# Altium PCB IPG_Rigid.PcbDoc (part 1 of 13)
Units mm, origin at the board's own origin, x right, y up, seen from the top; angles counter-clockwise.
Board outline 69.6 x 90.73 mm, 10 copper layers (TOP, DHOR, DVERT, GND 1, POWER, GND 2, GND 3, AVERT, AHOR, BOT), stack 1.198 mm thick; 745 components, 398 nets, 1997 pads, 2678 vias.
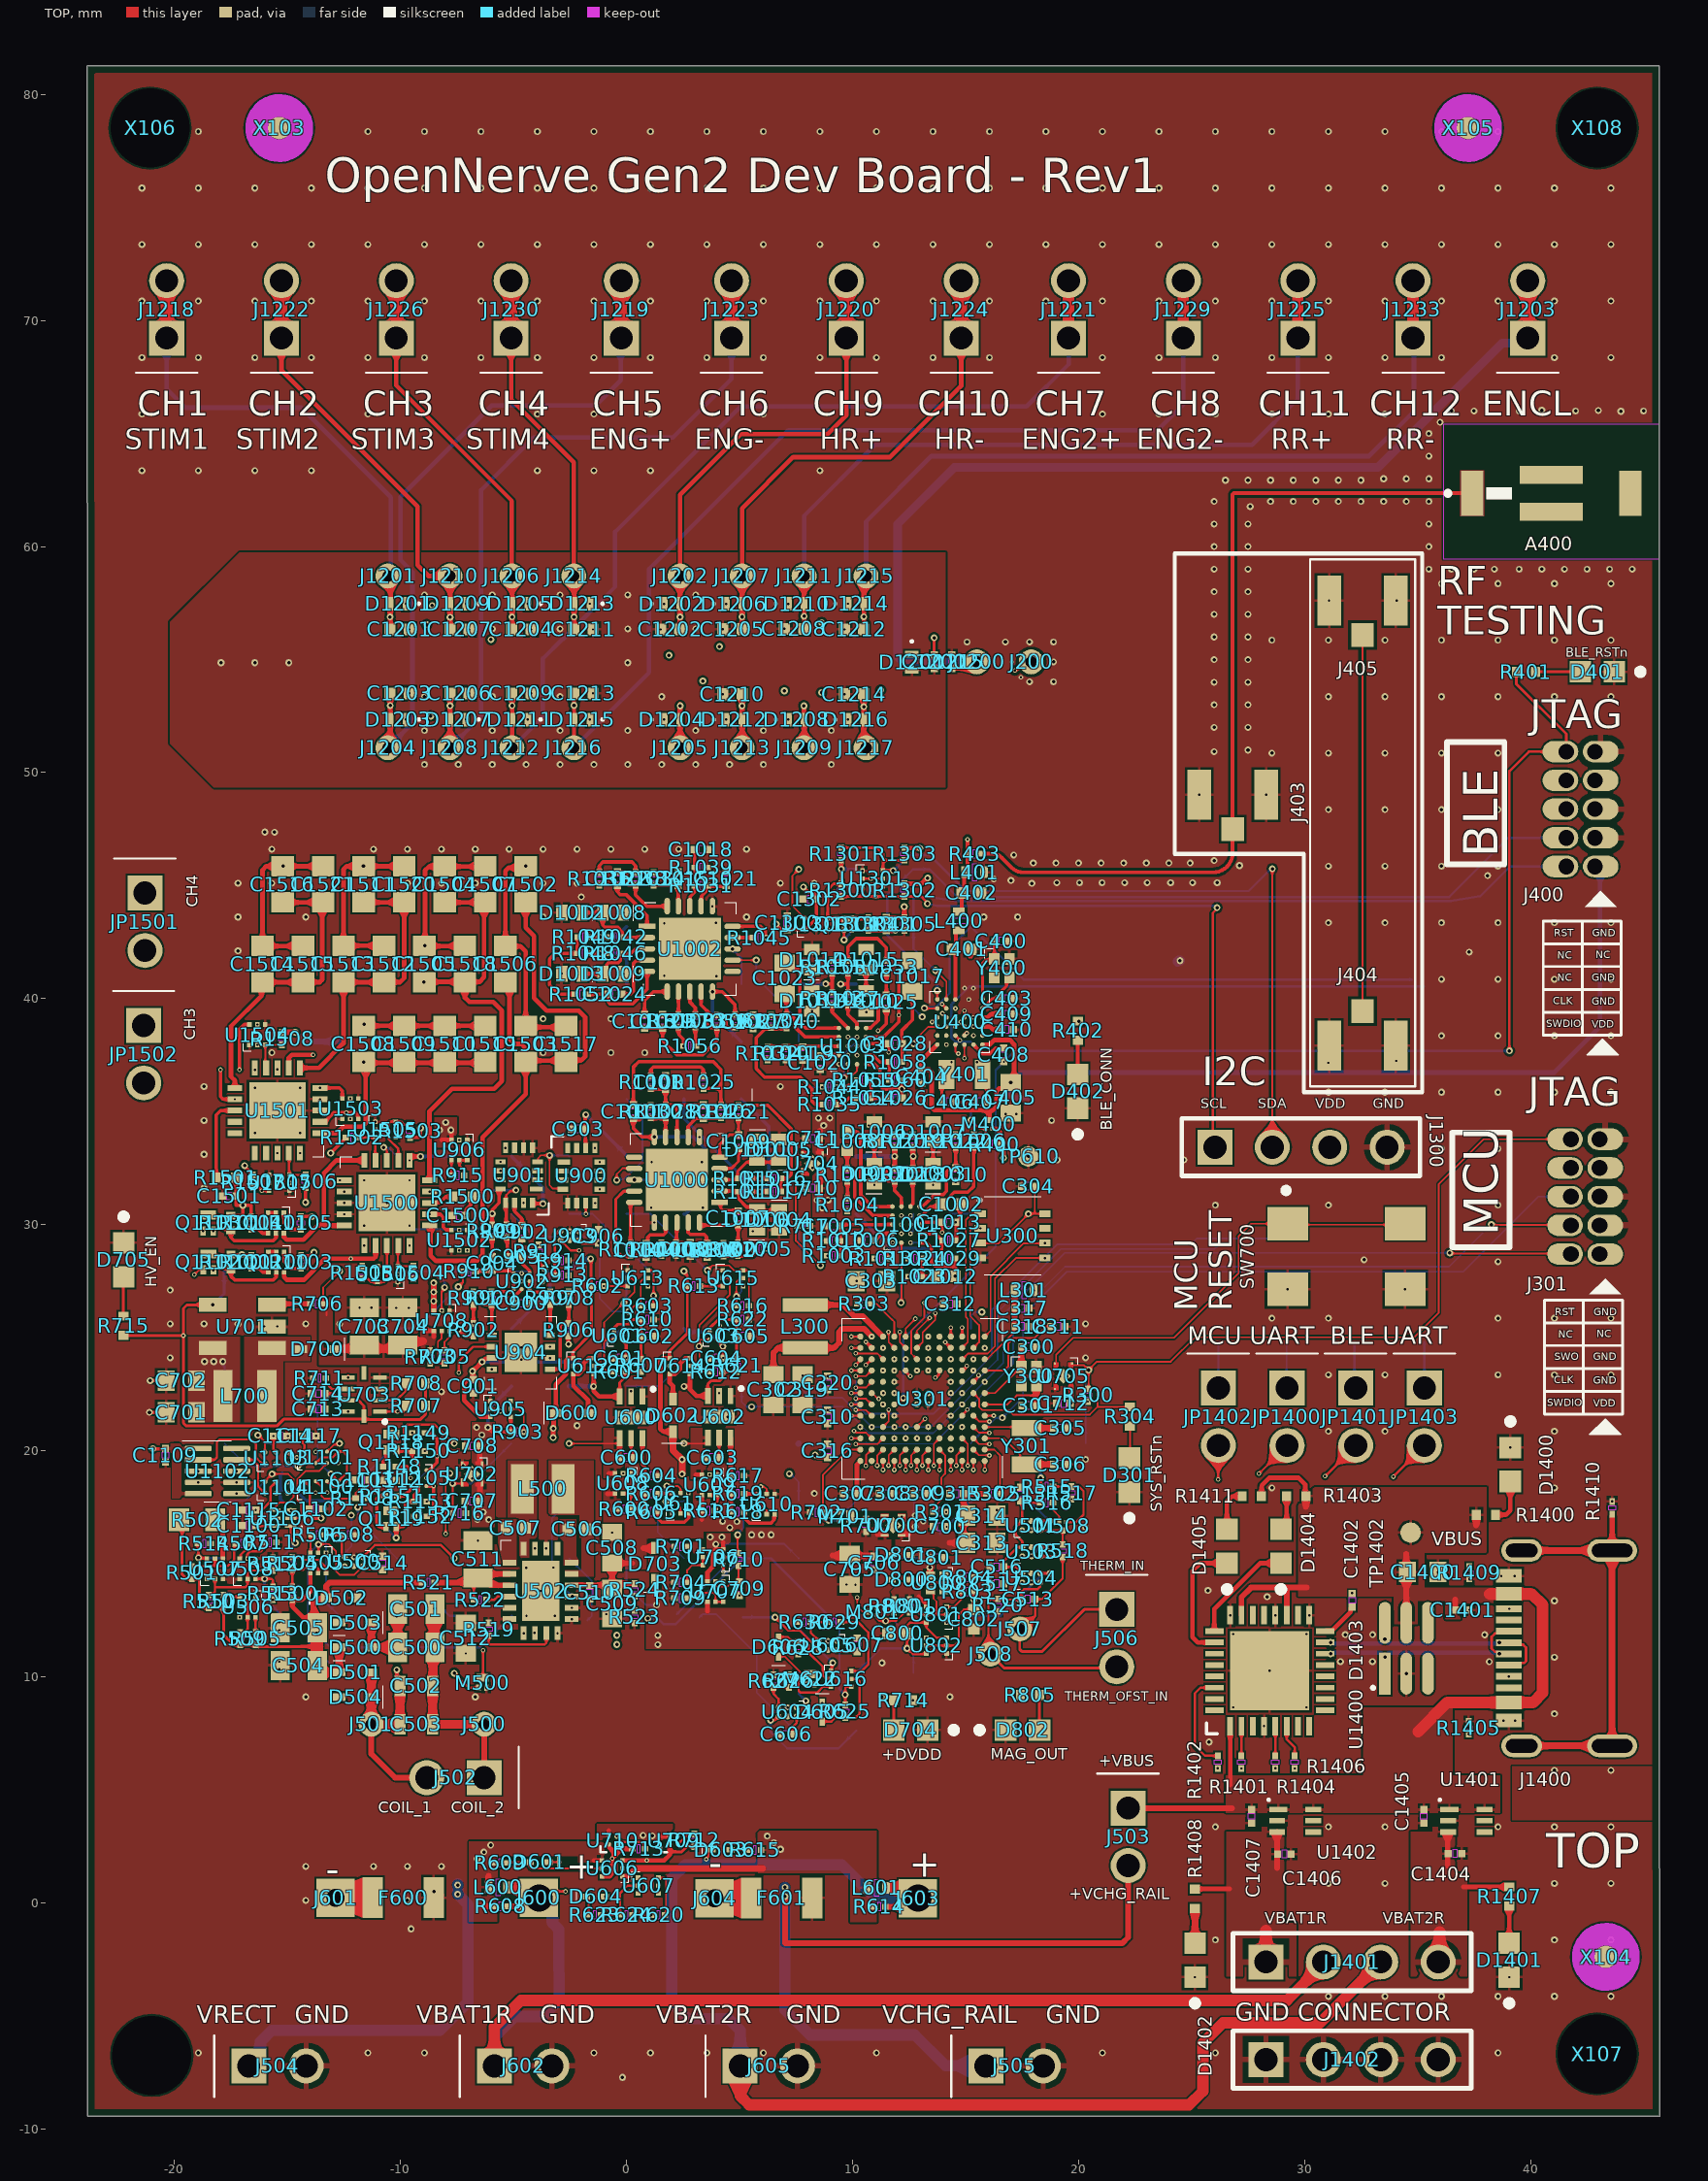
[diagram p0: TOP view]
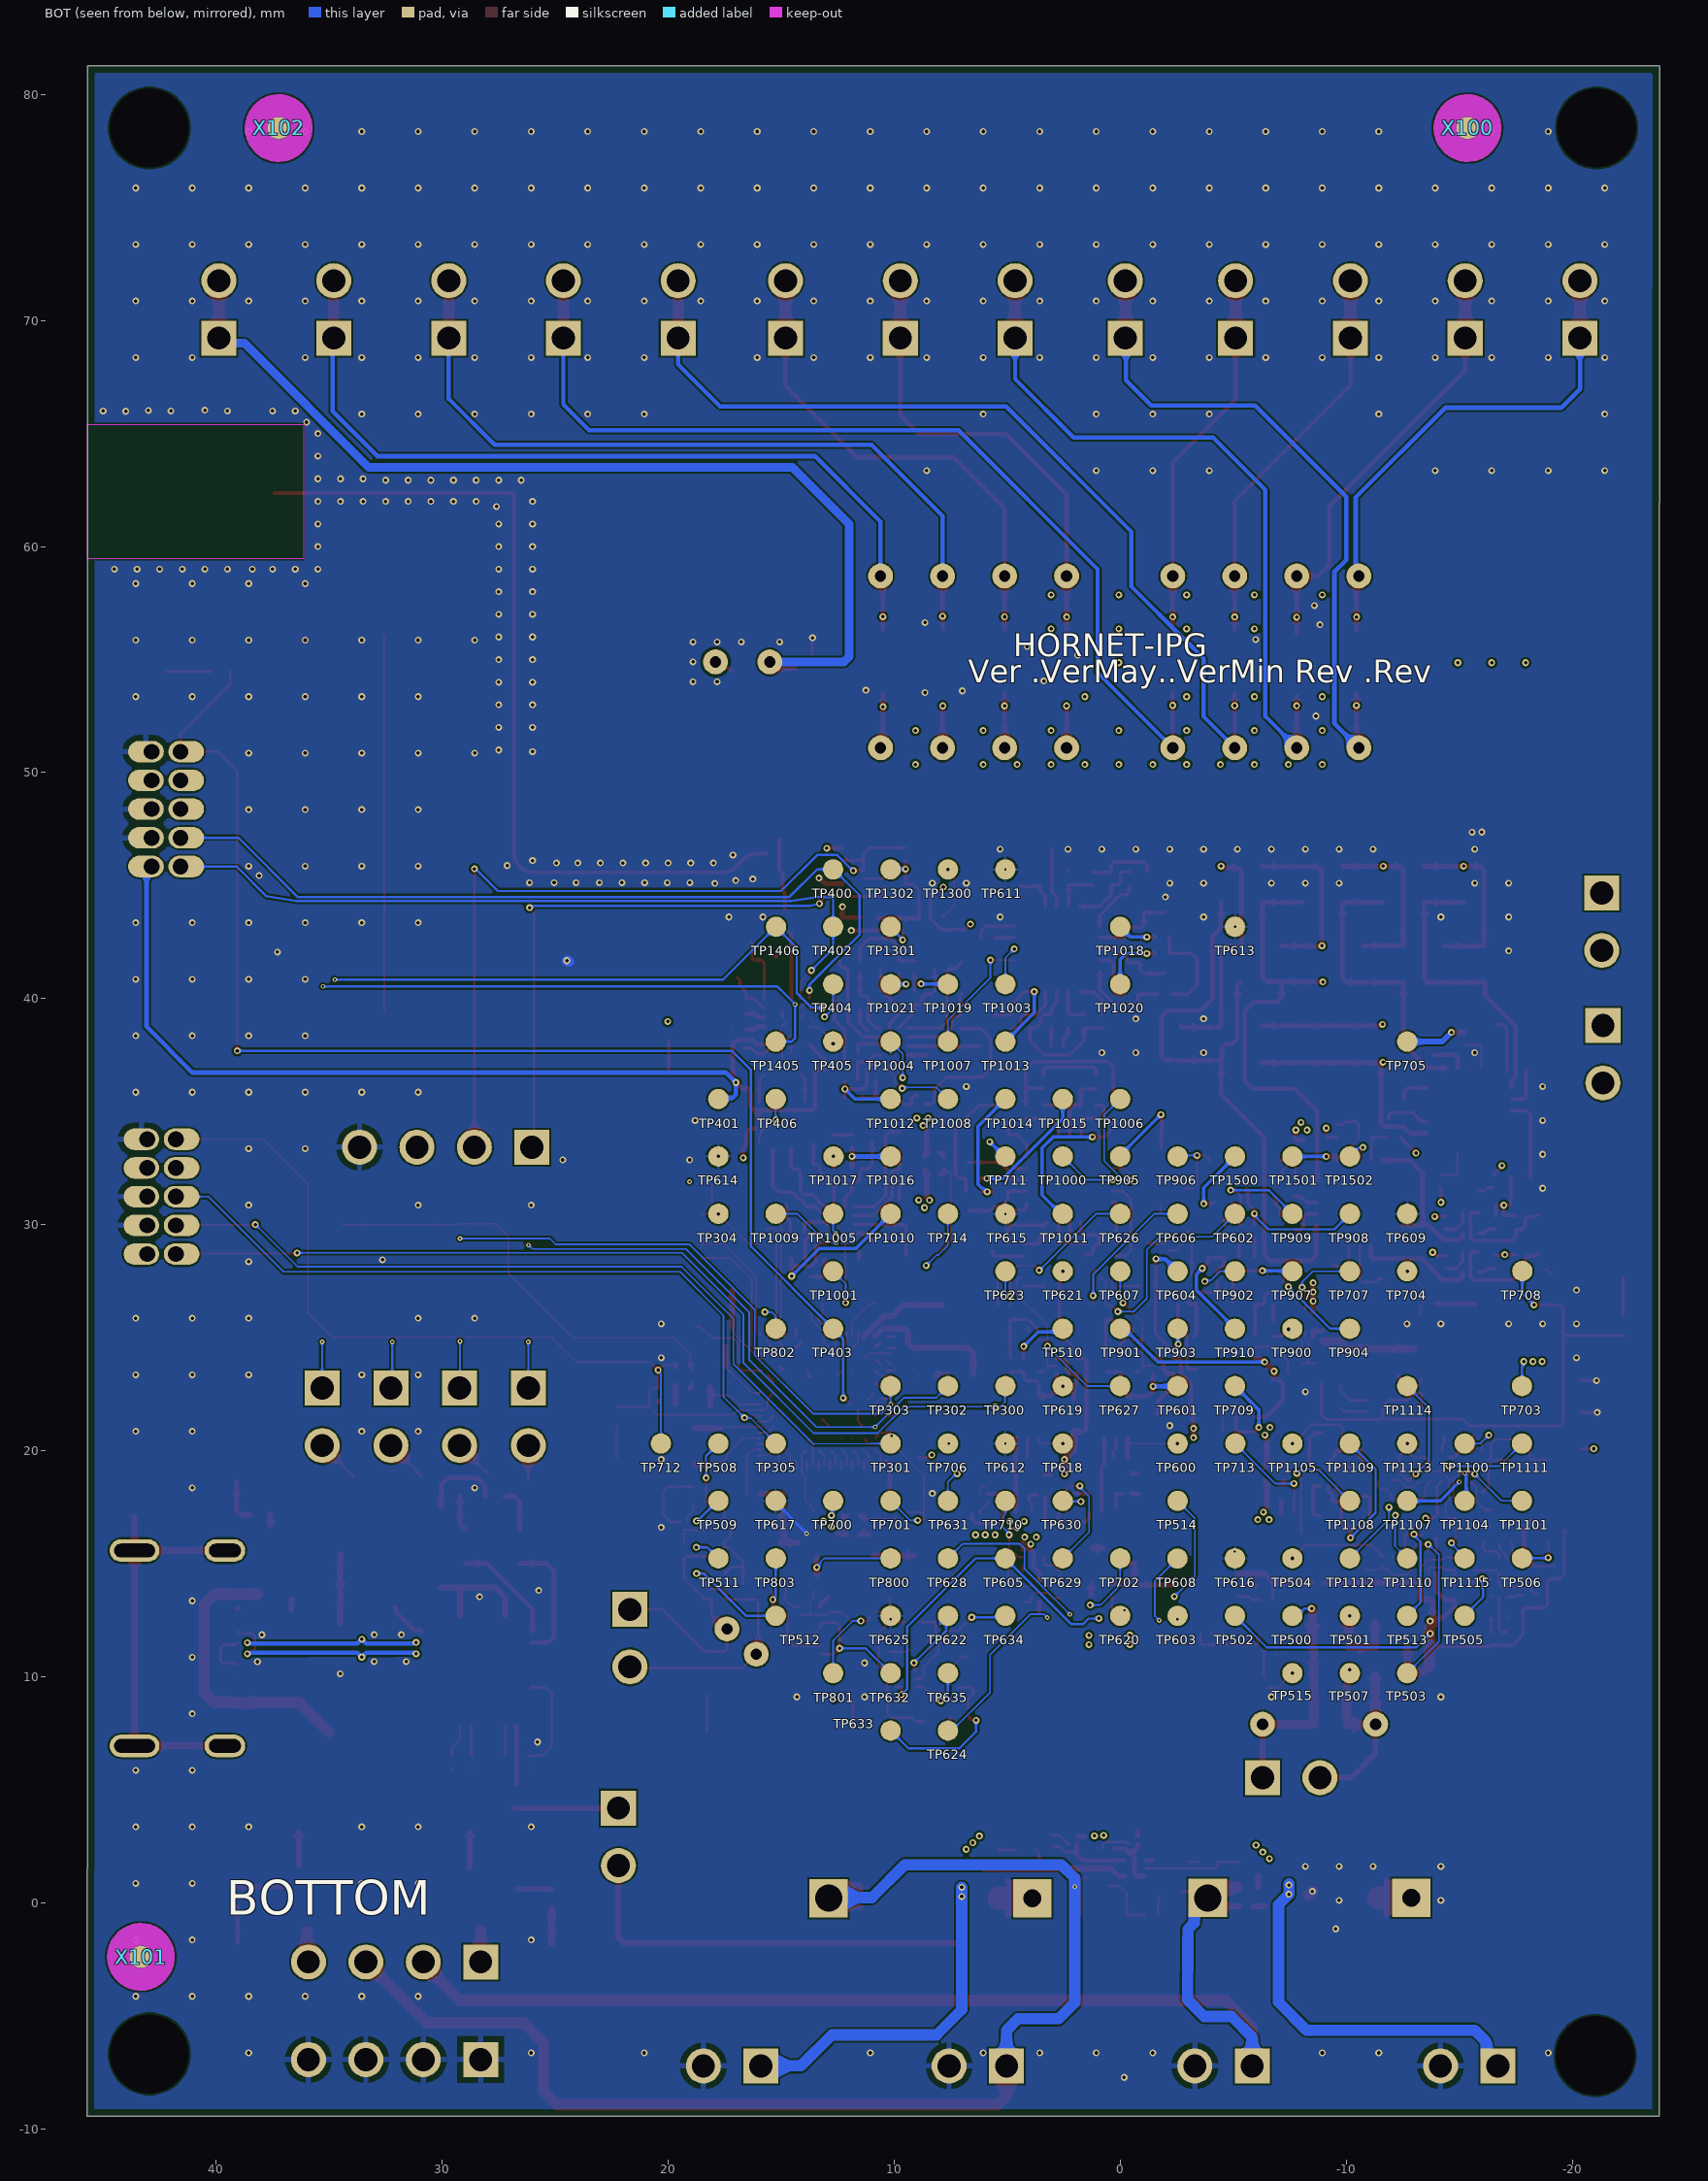
[diagram p1: BOT view, seen from below]
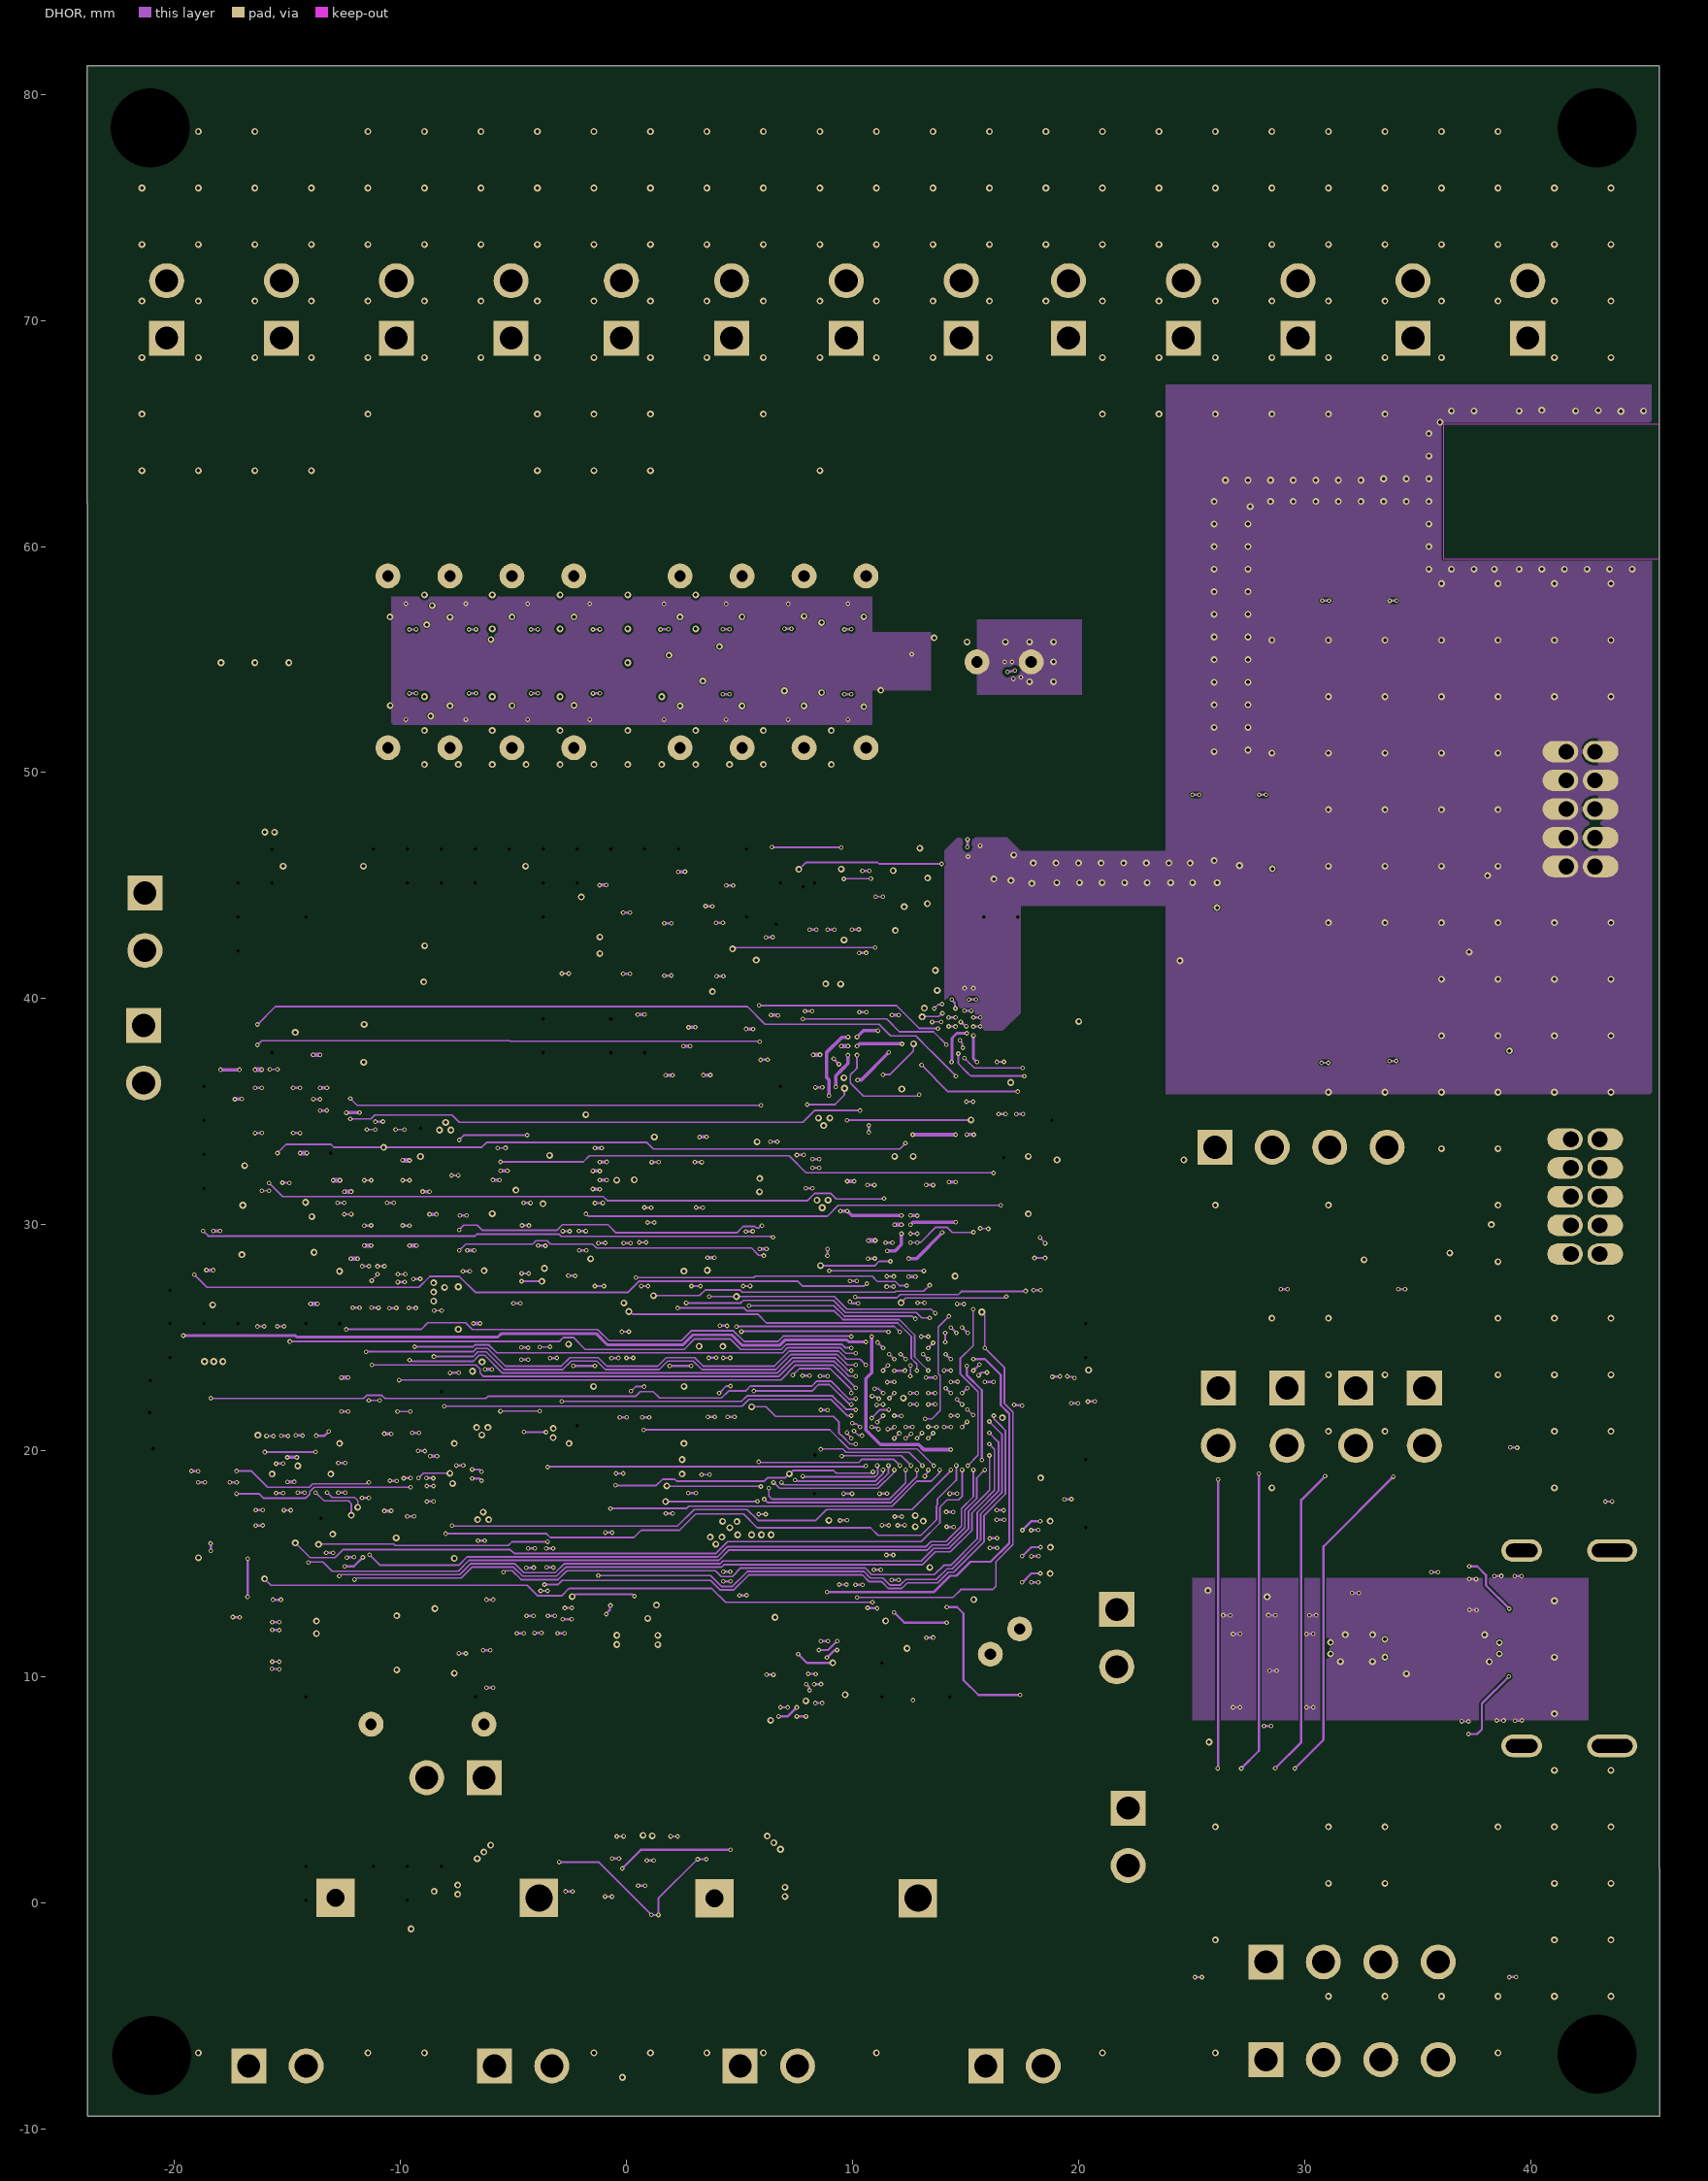
[diagram p2: DHOR]
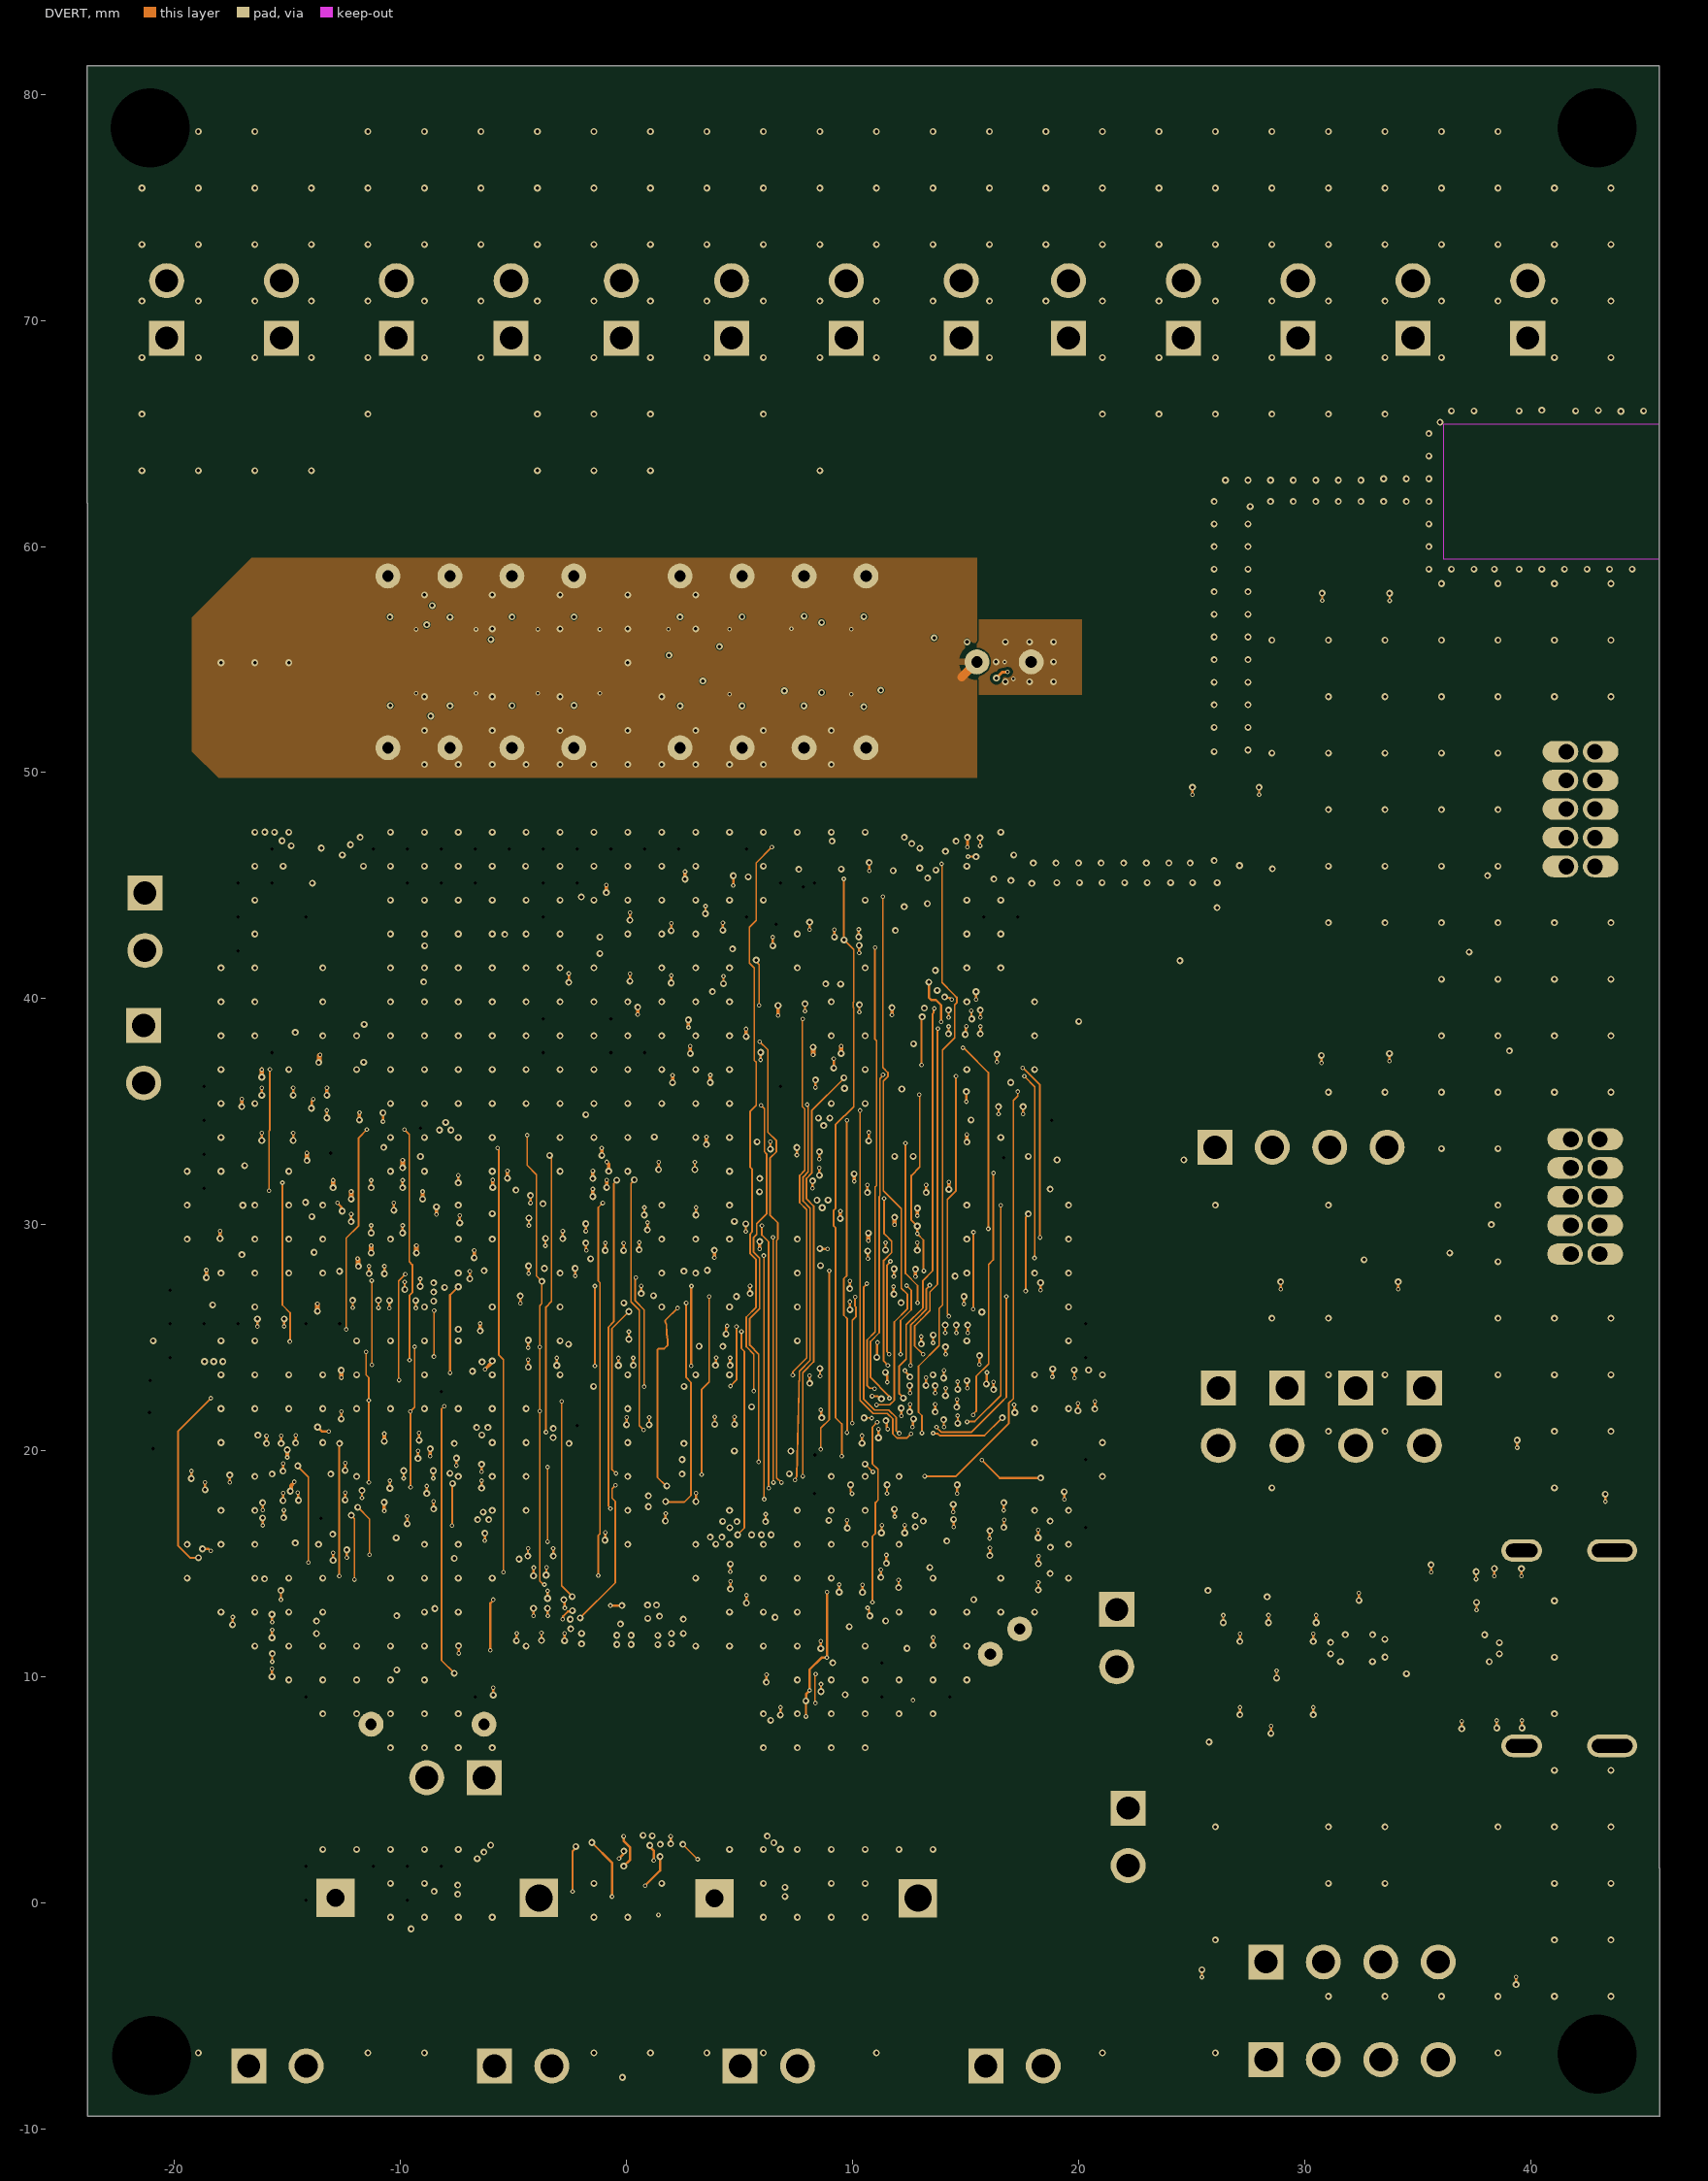
[diagram p3: DVERT]
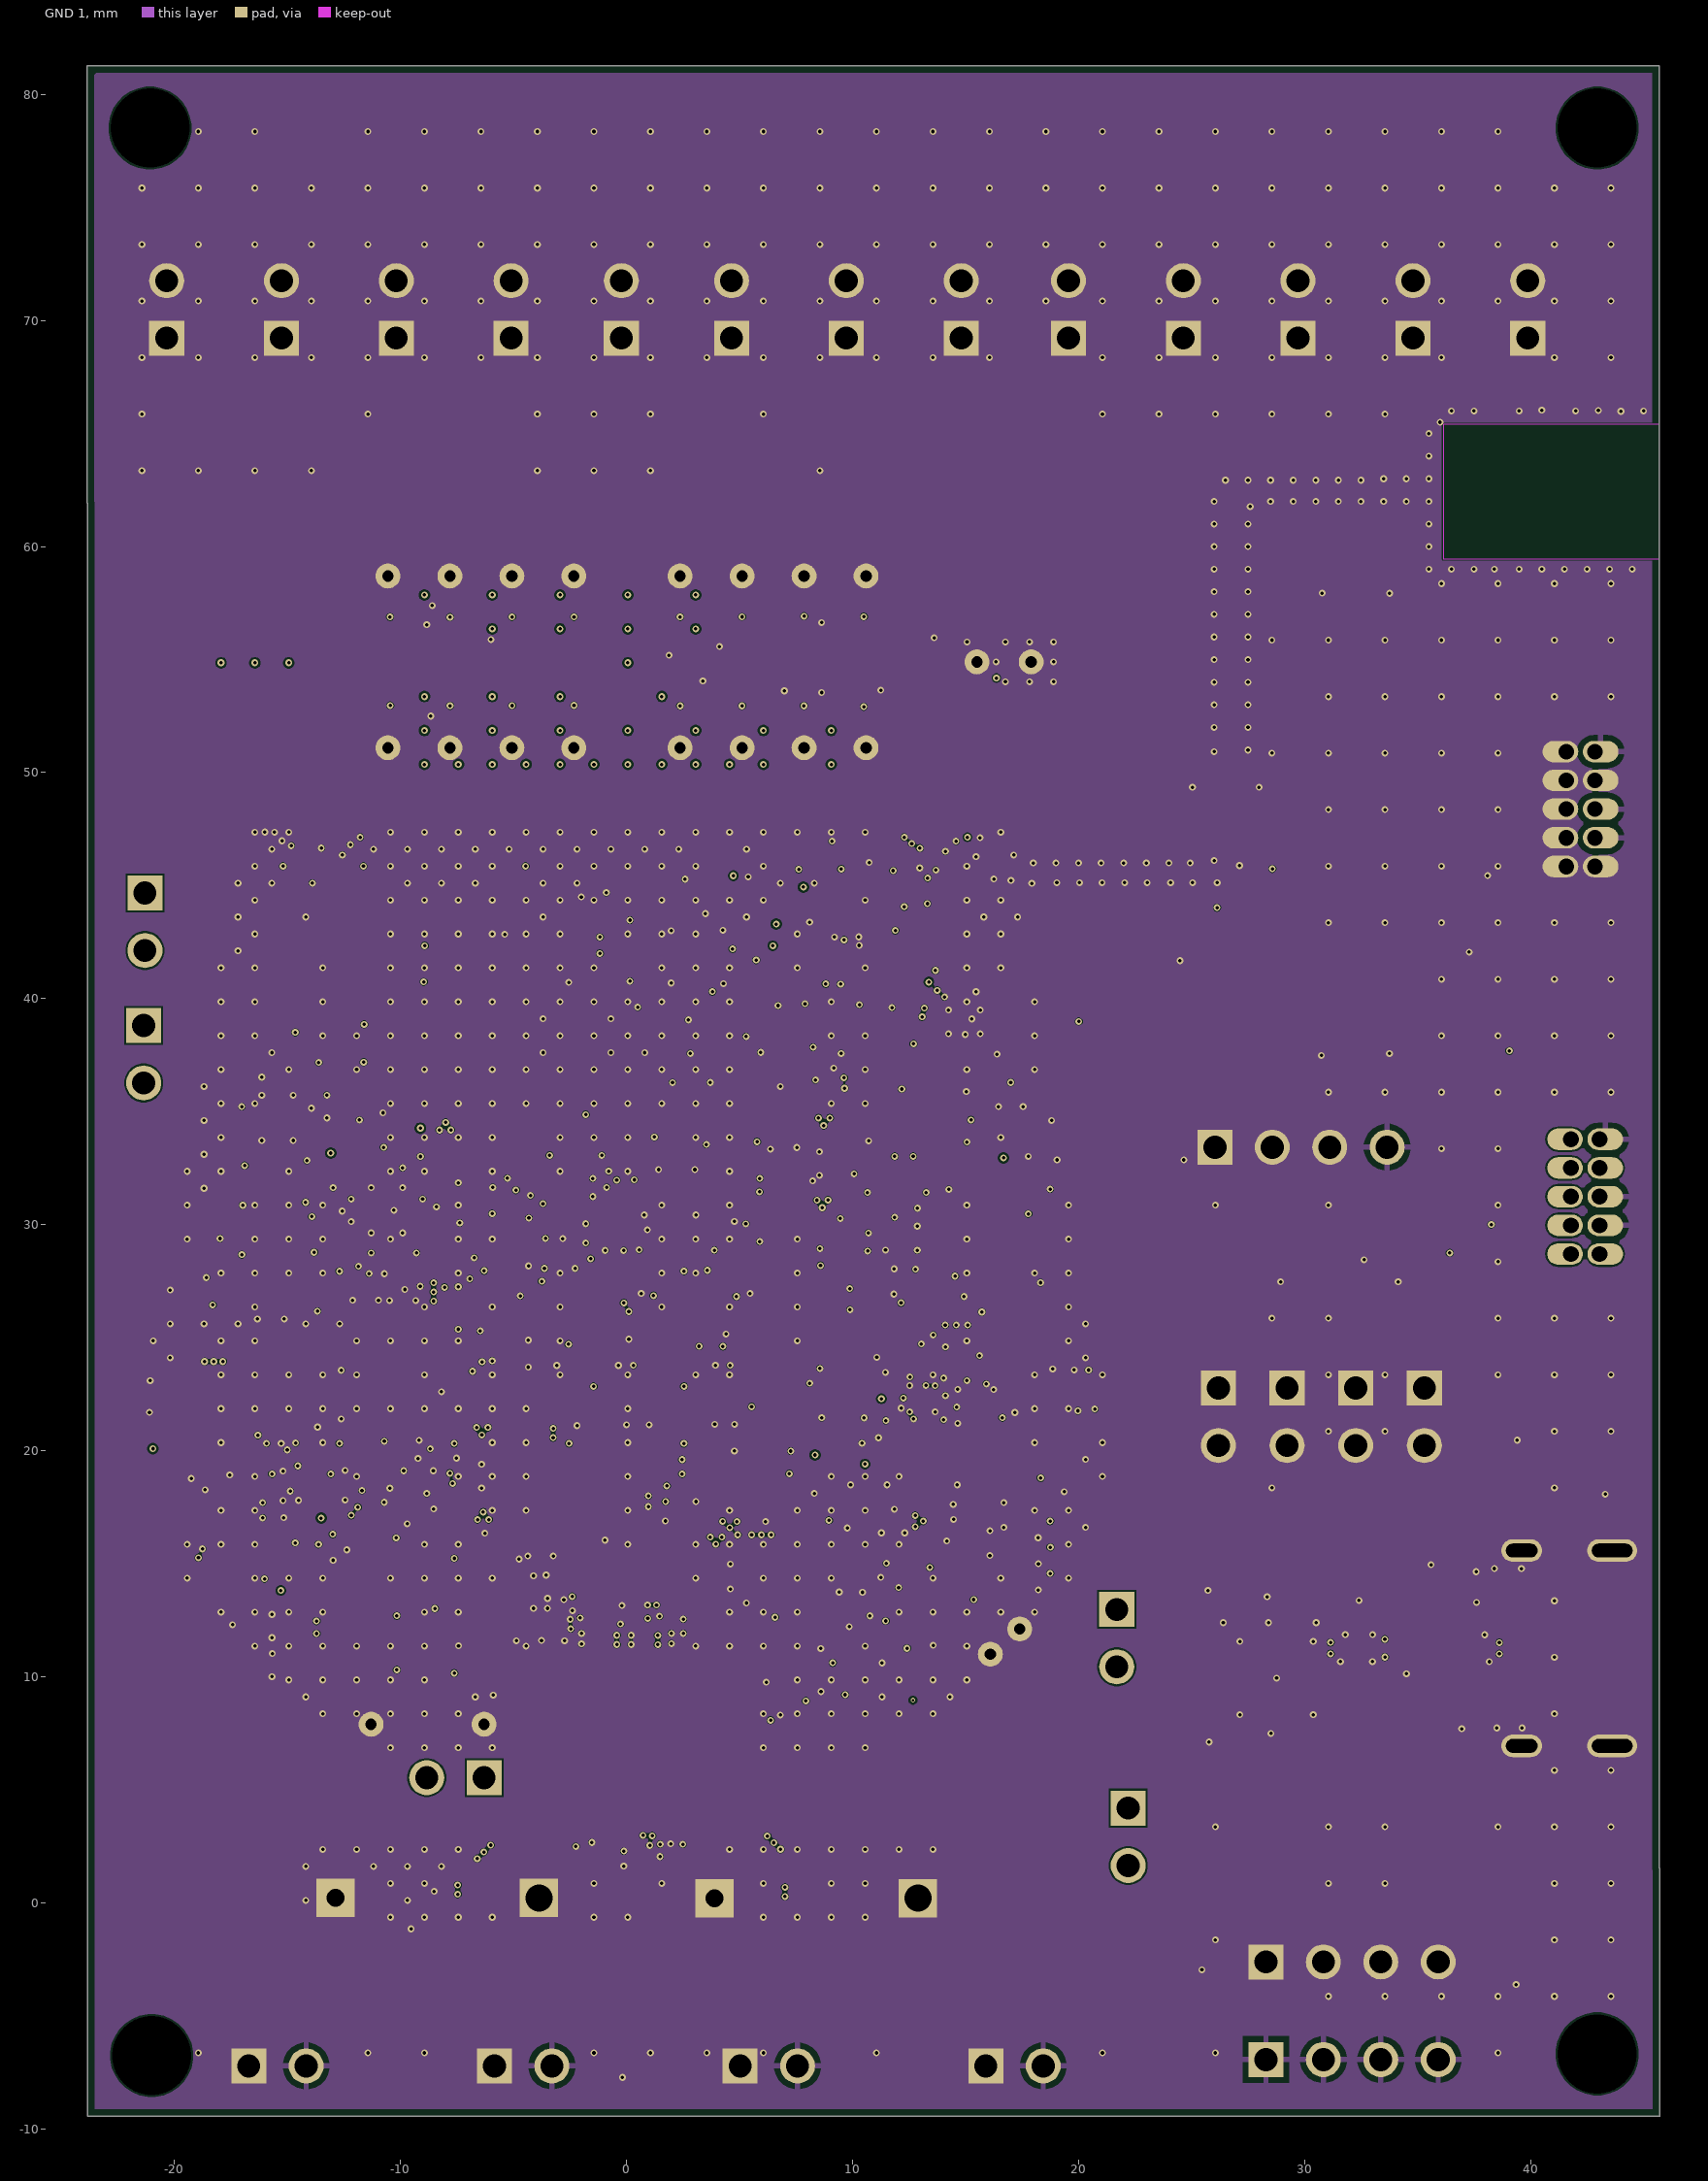
[diagram p4: GND 1]
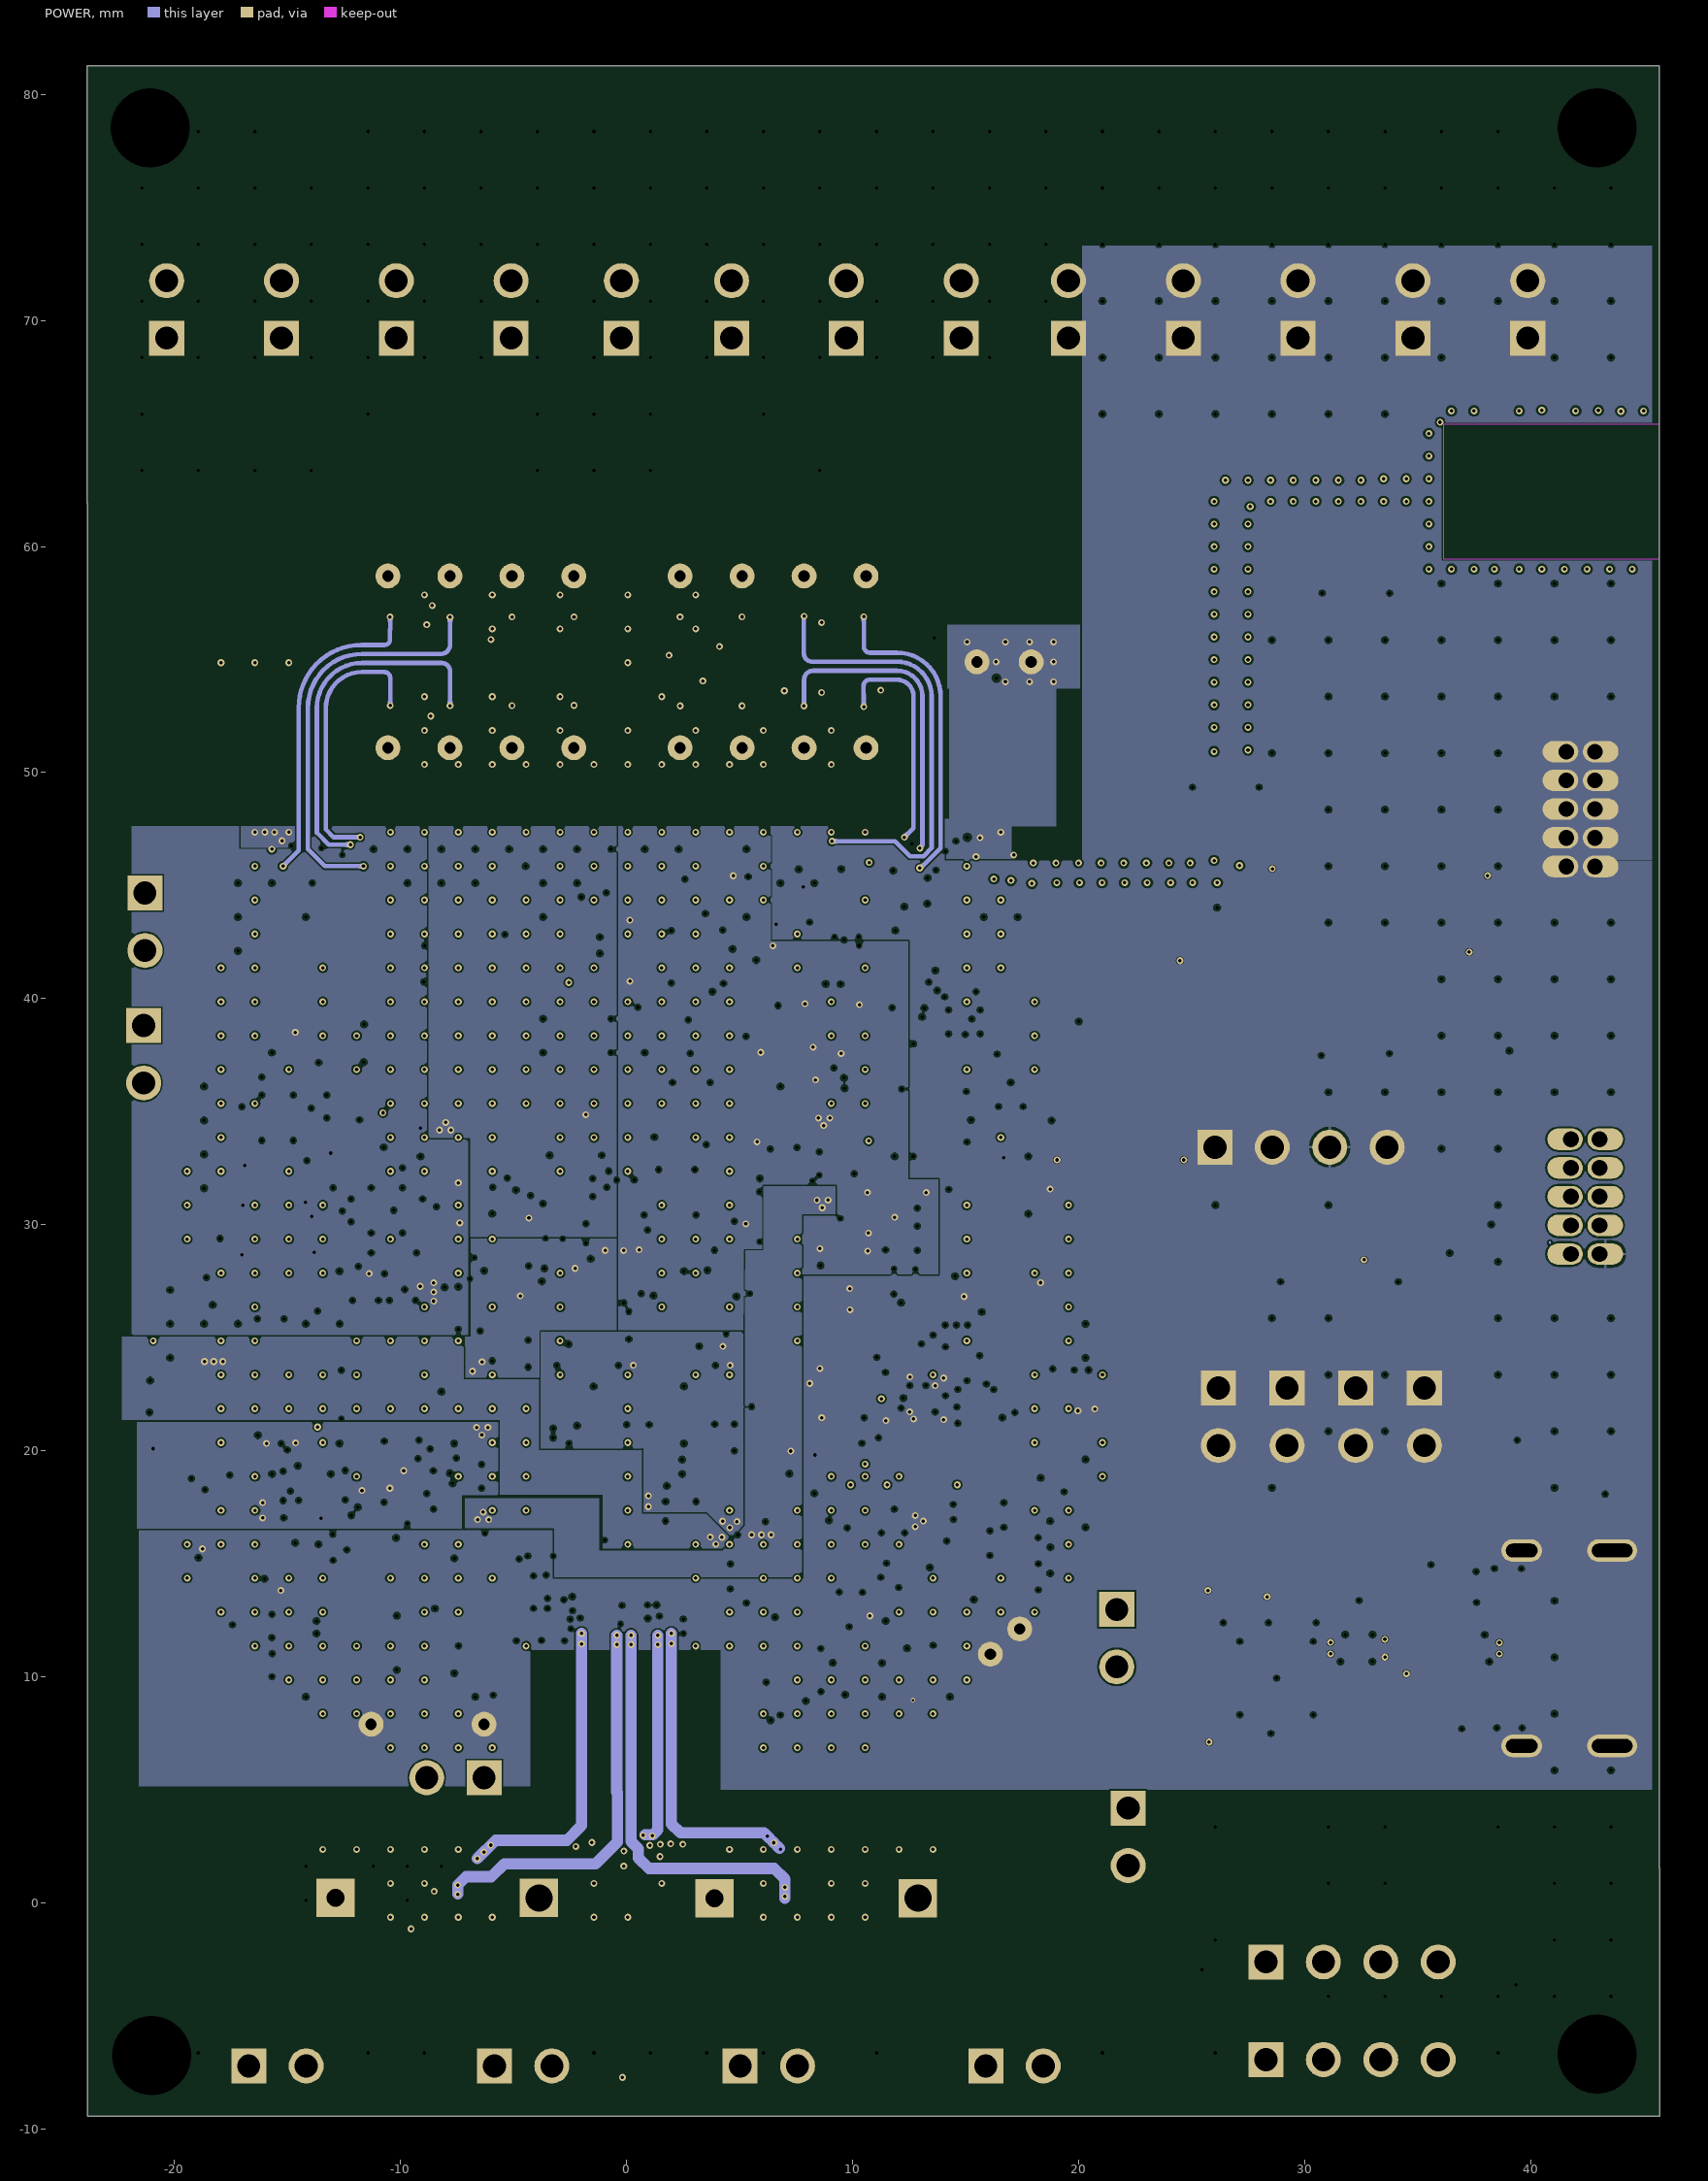
[diagram p5: POWER]
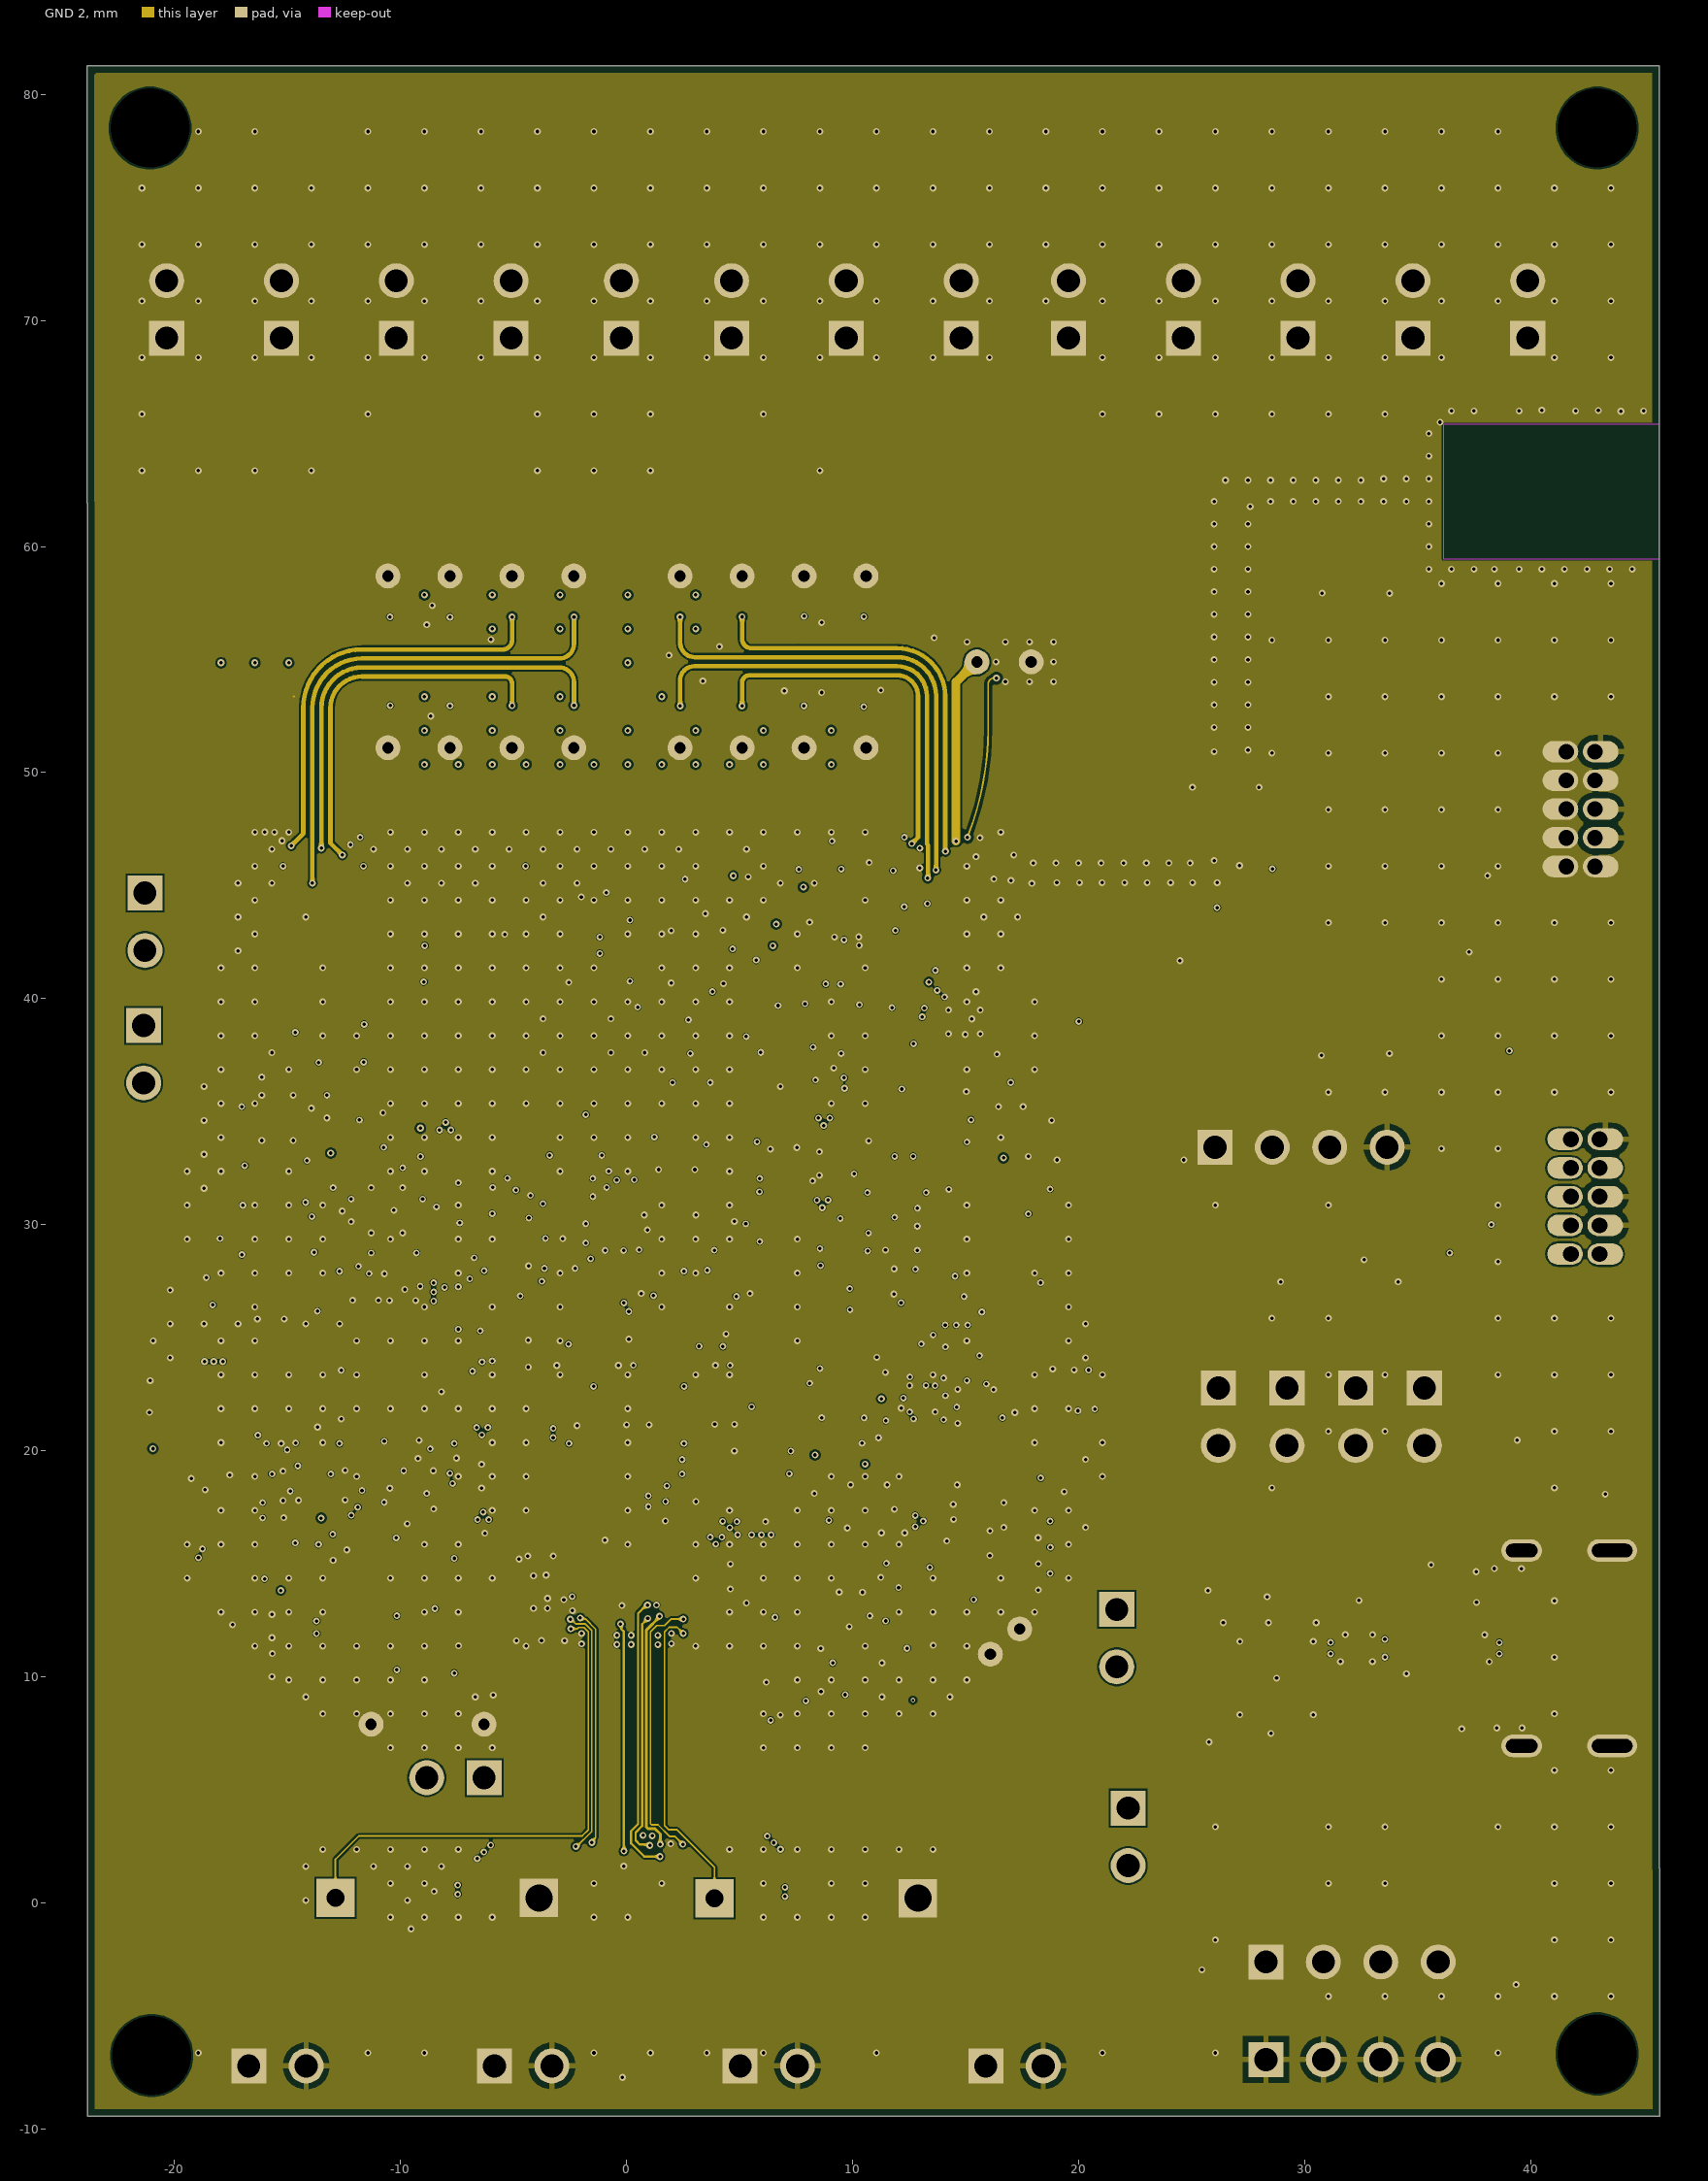
[diagram p6: GND 2]
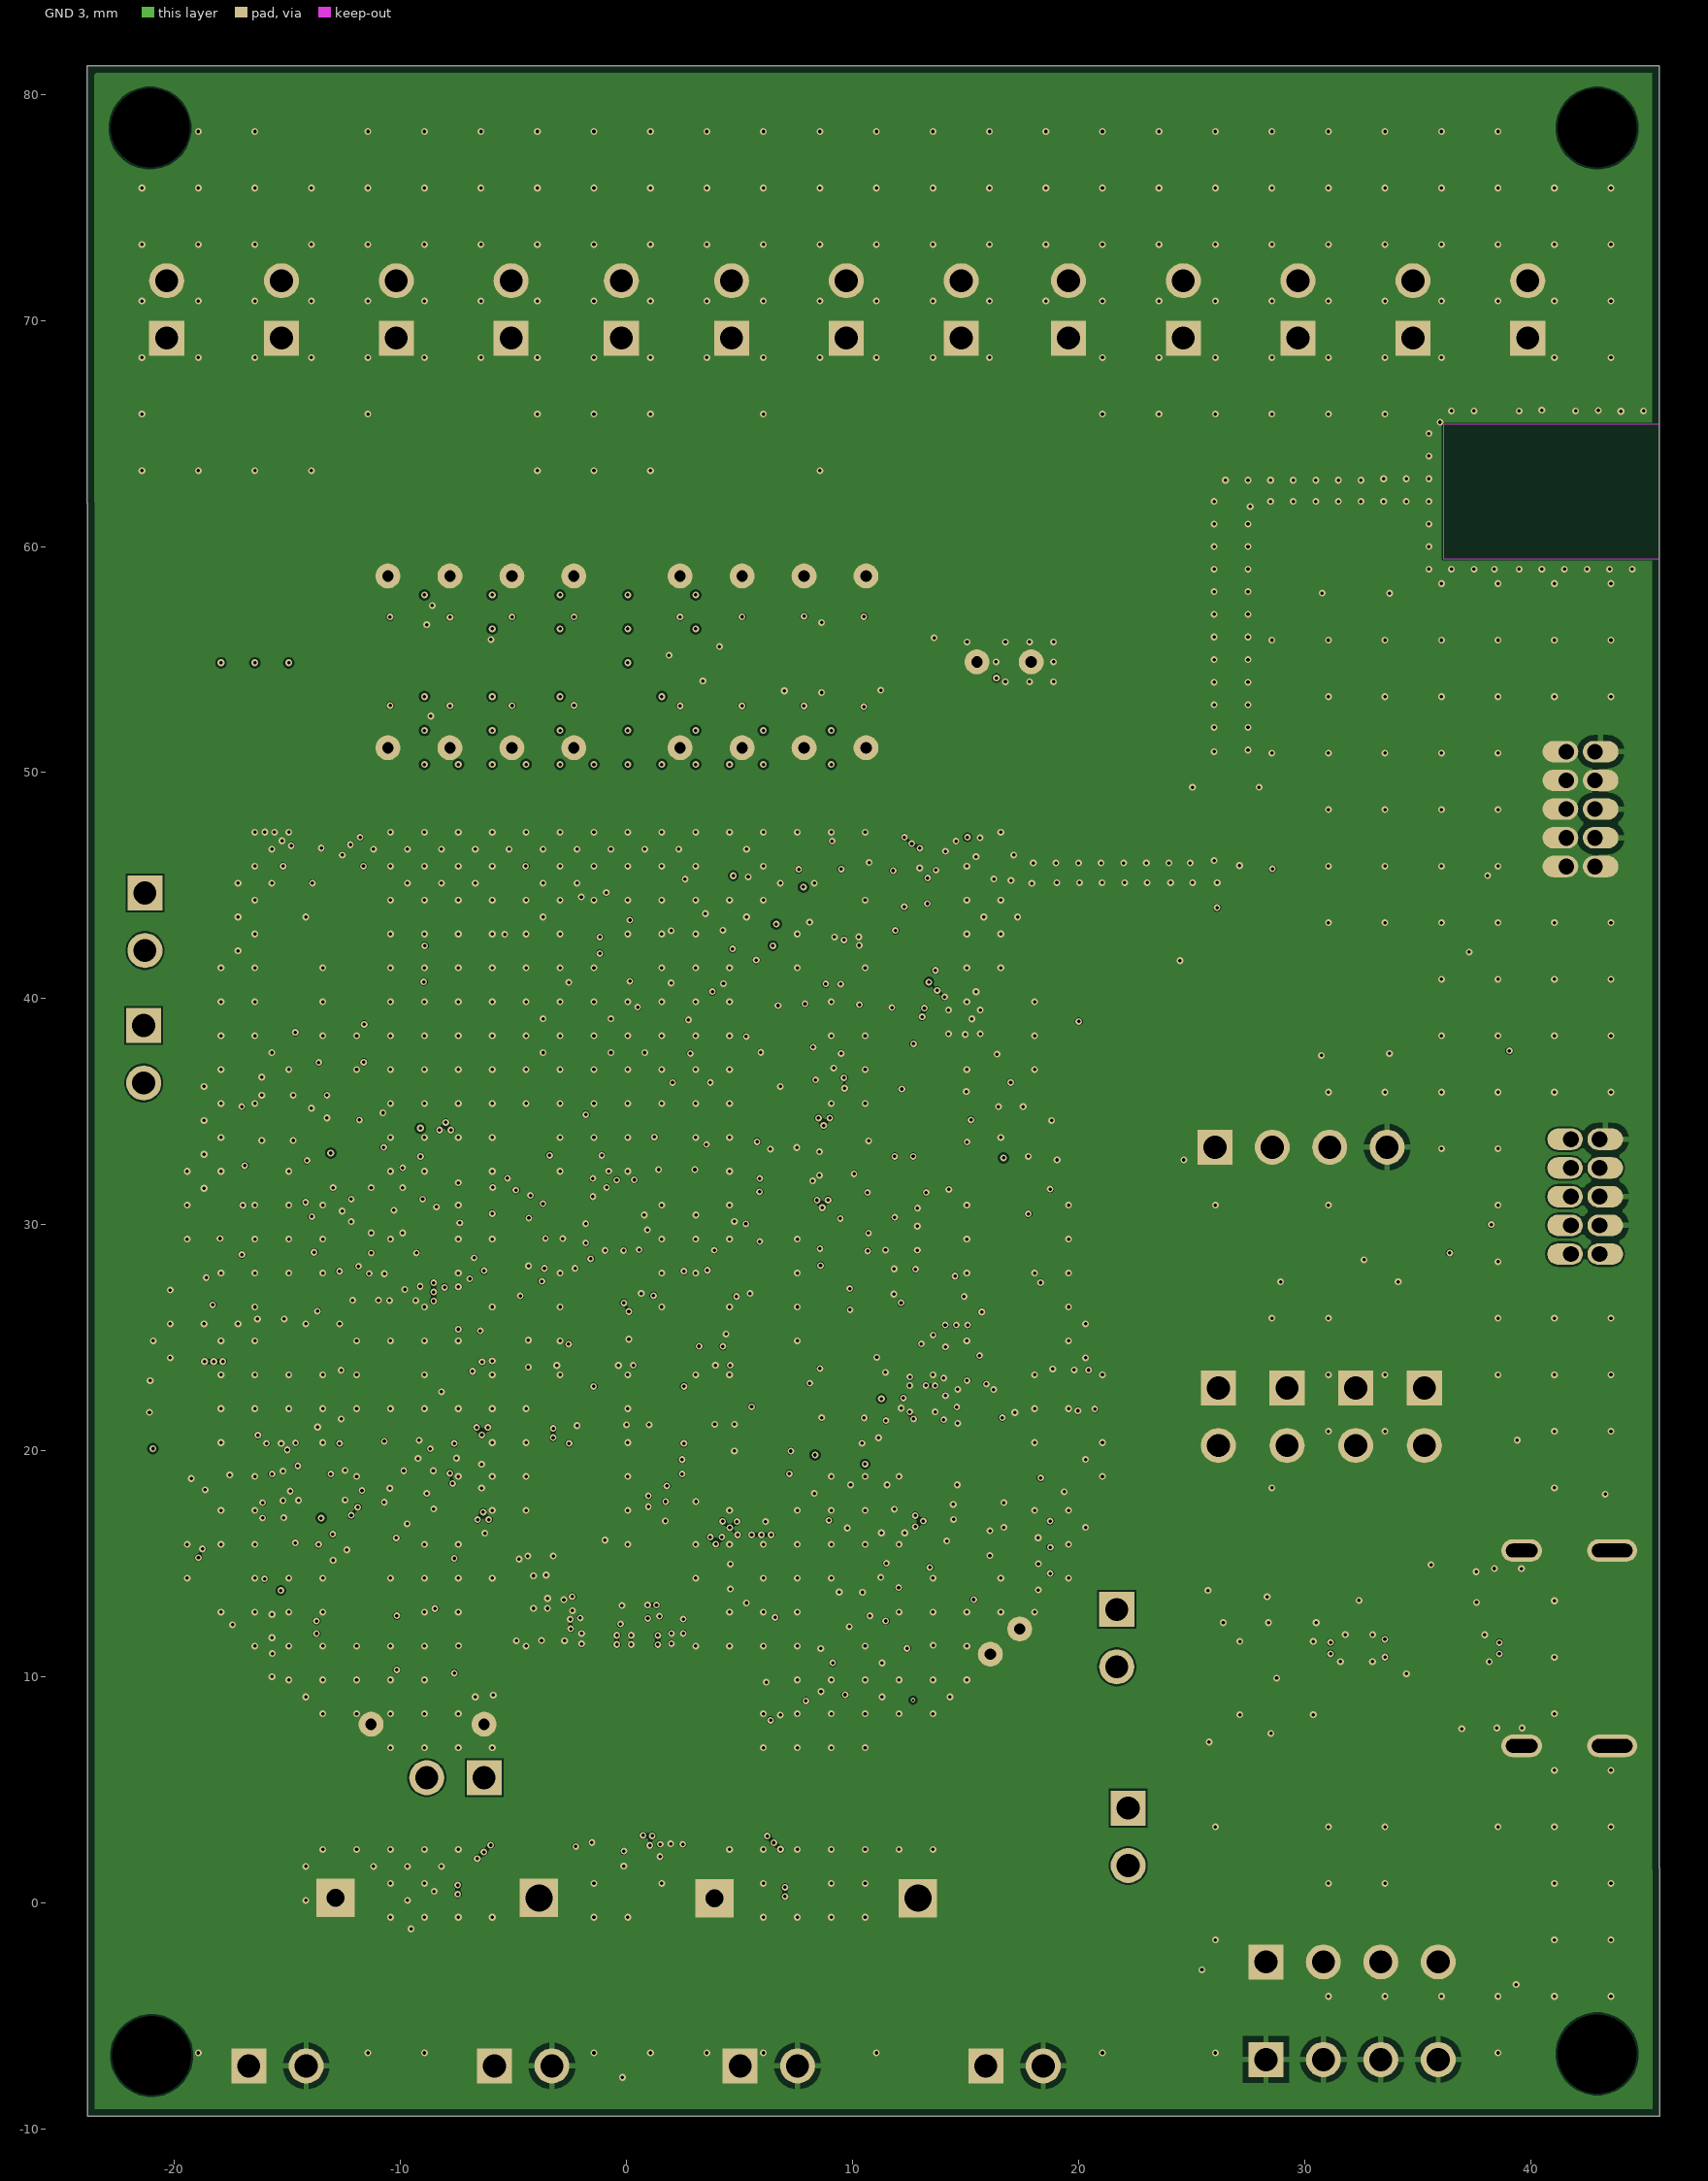
[diagram p7: GND 3]
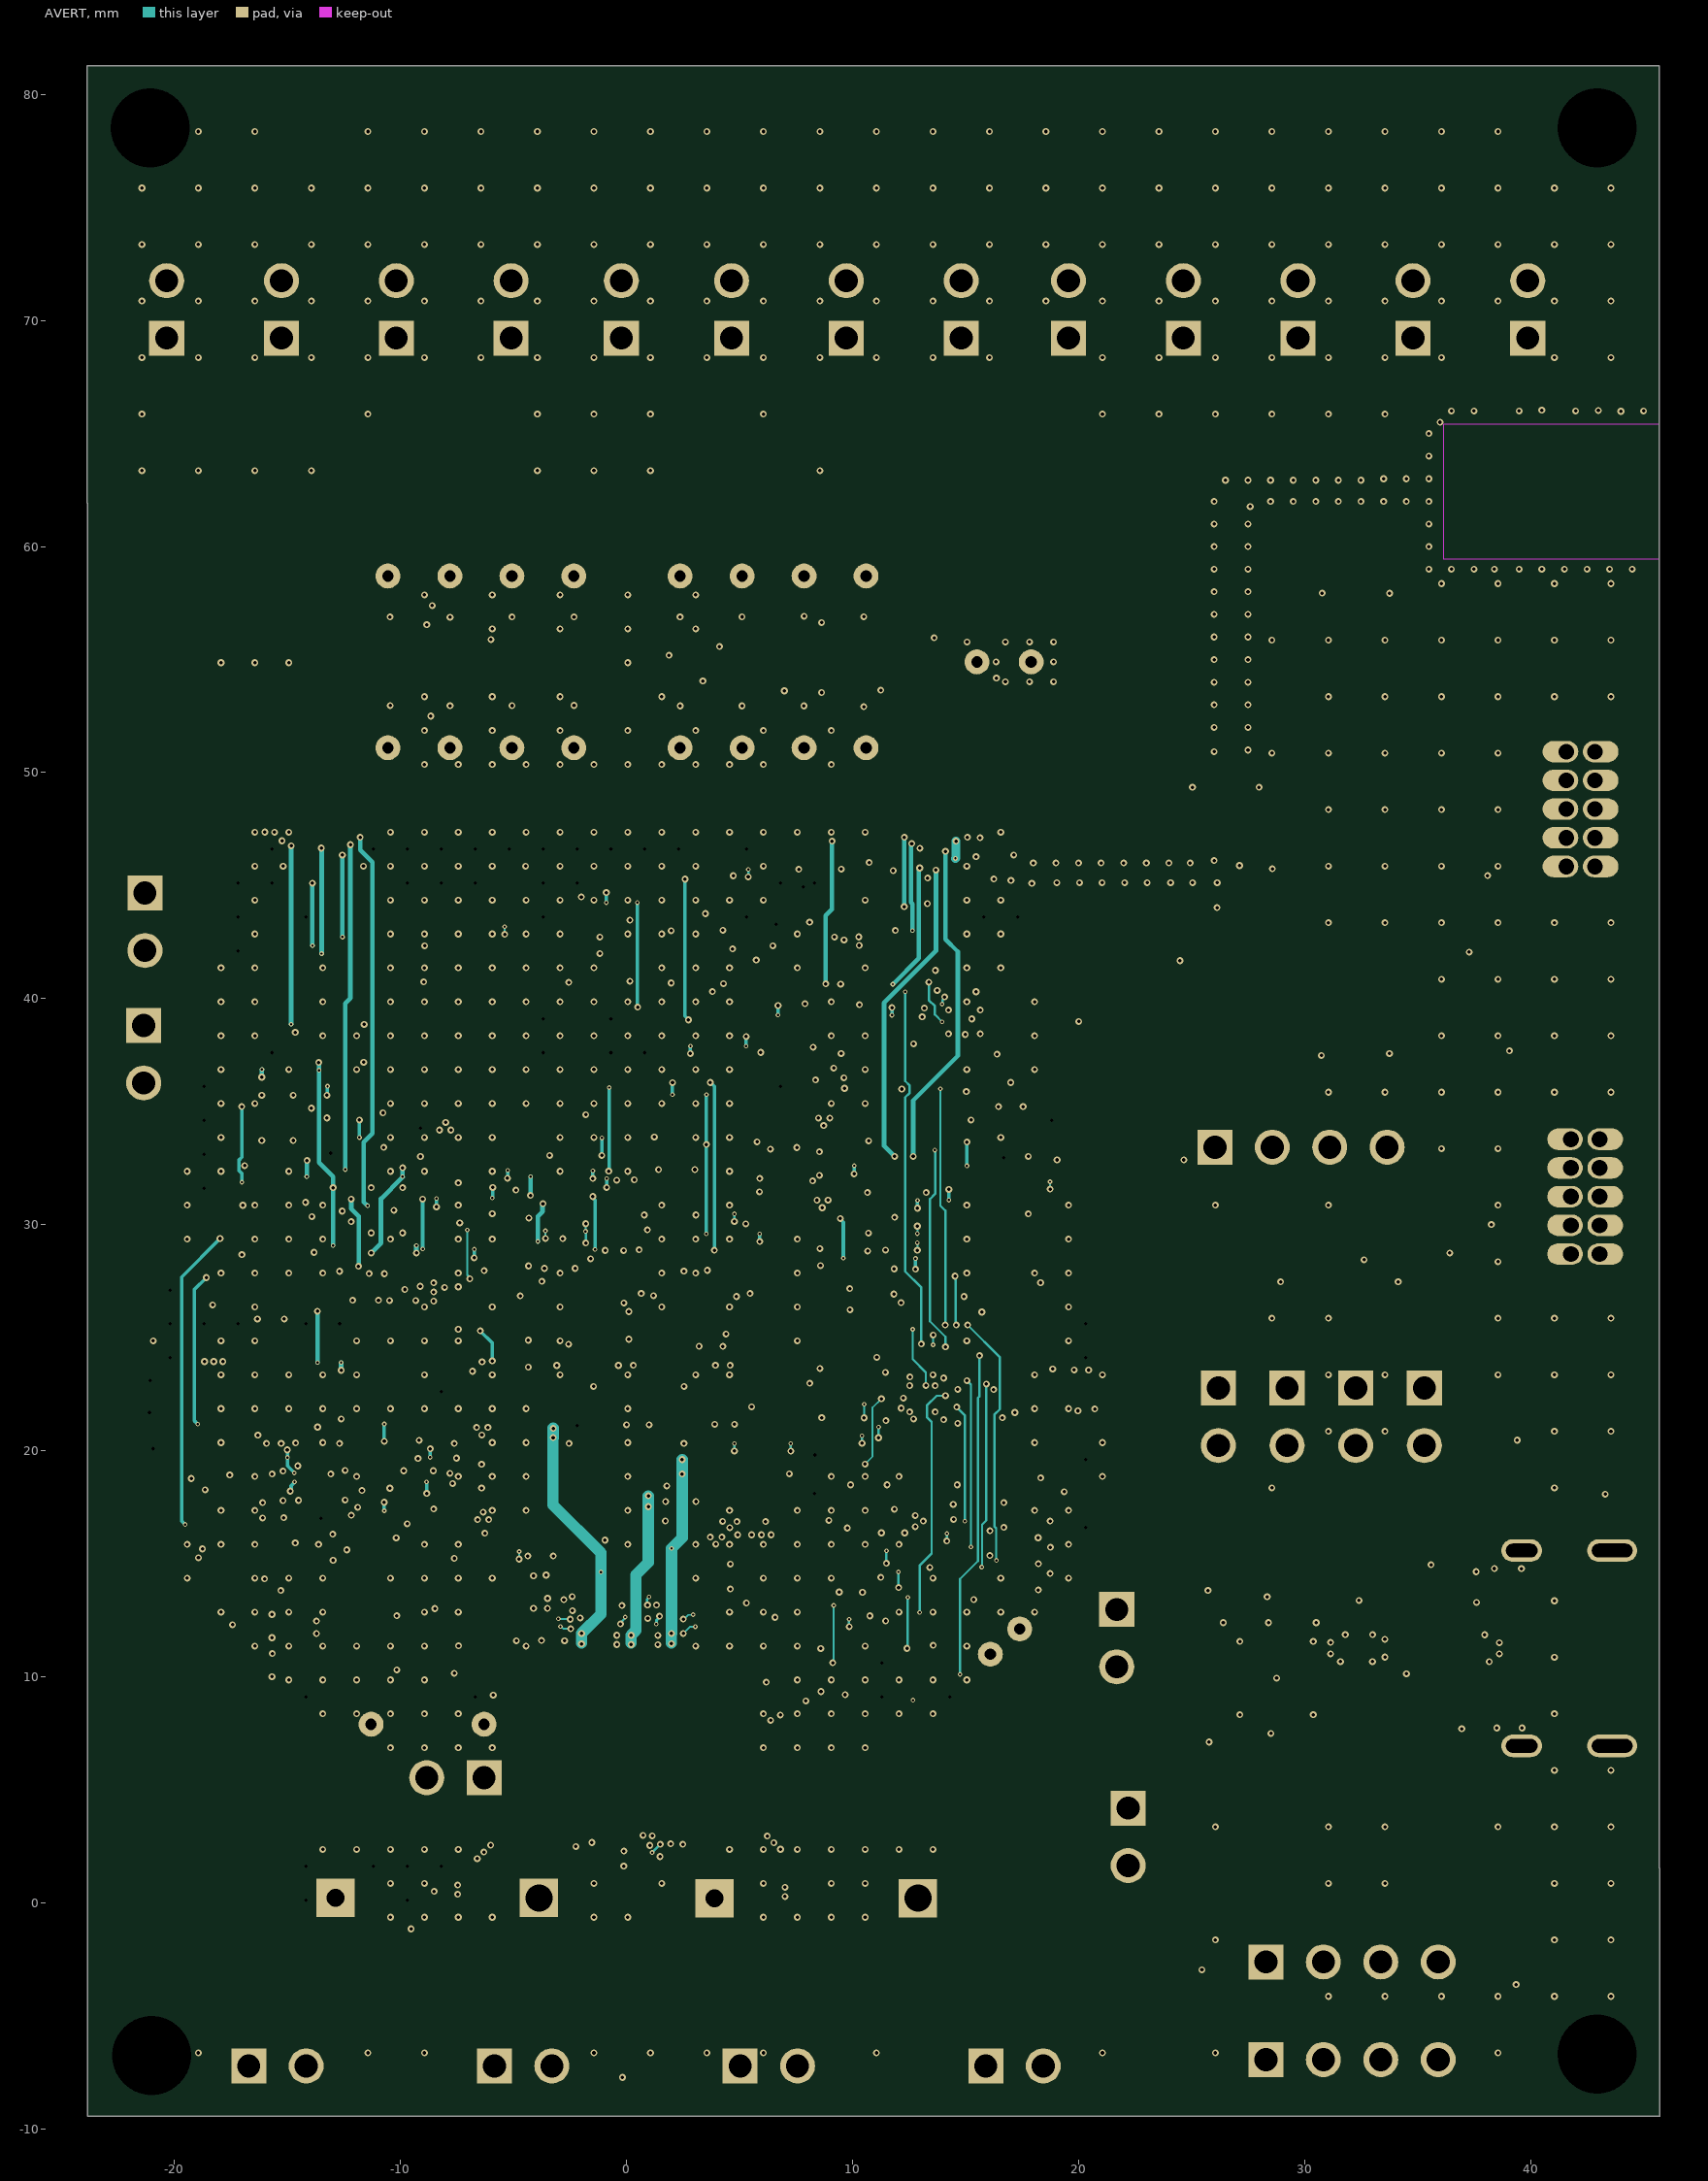
[diagram p8: AVERT]
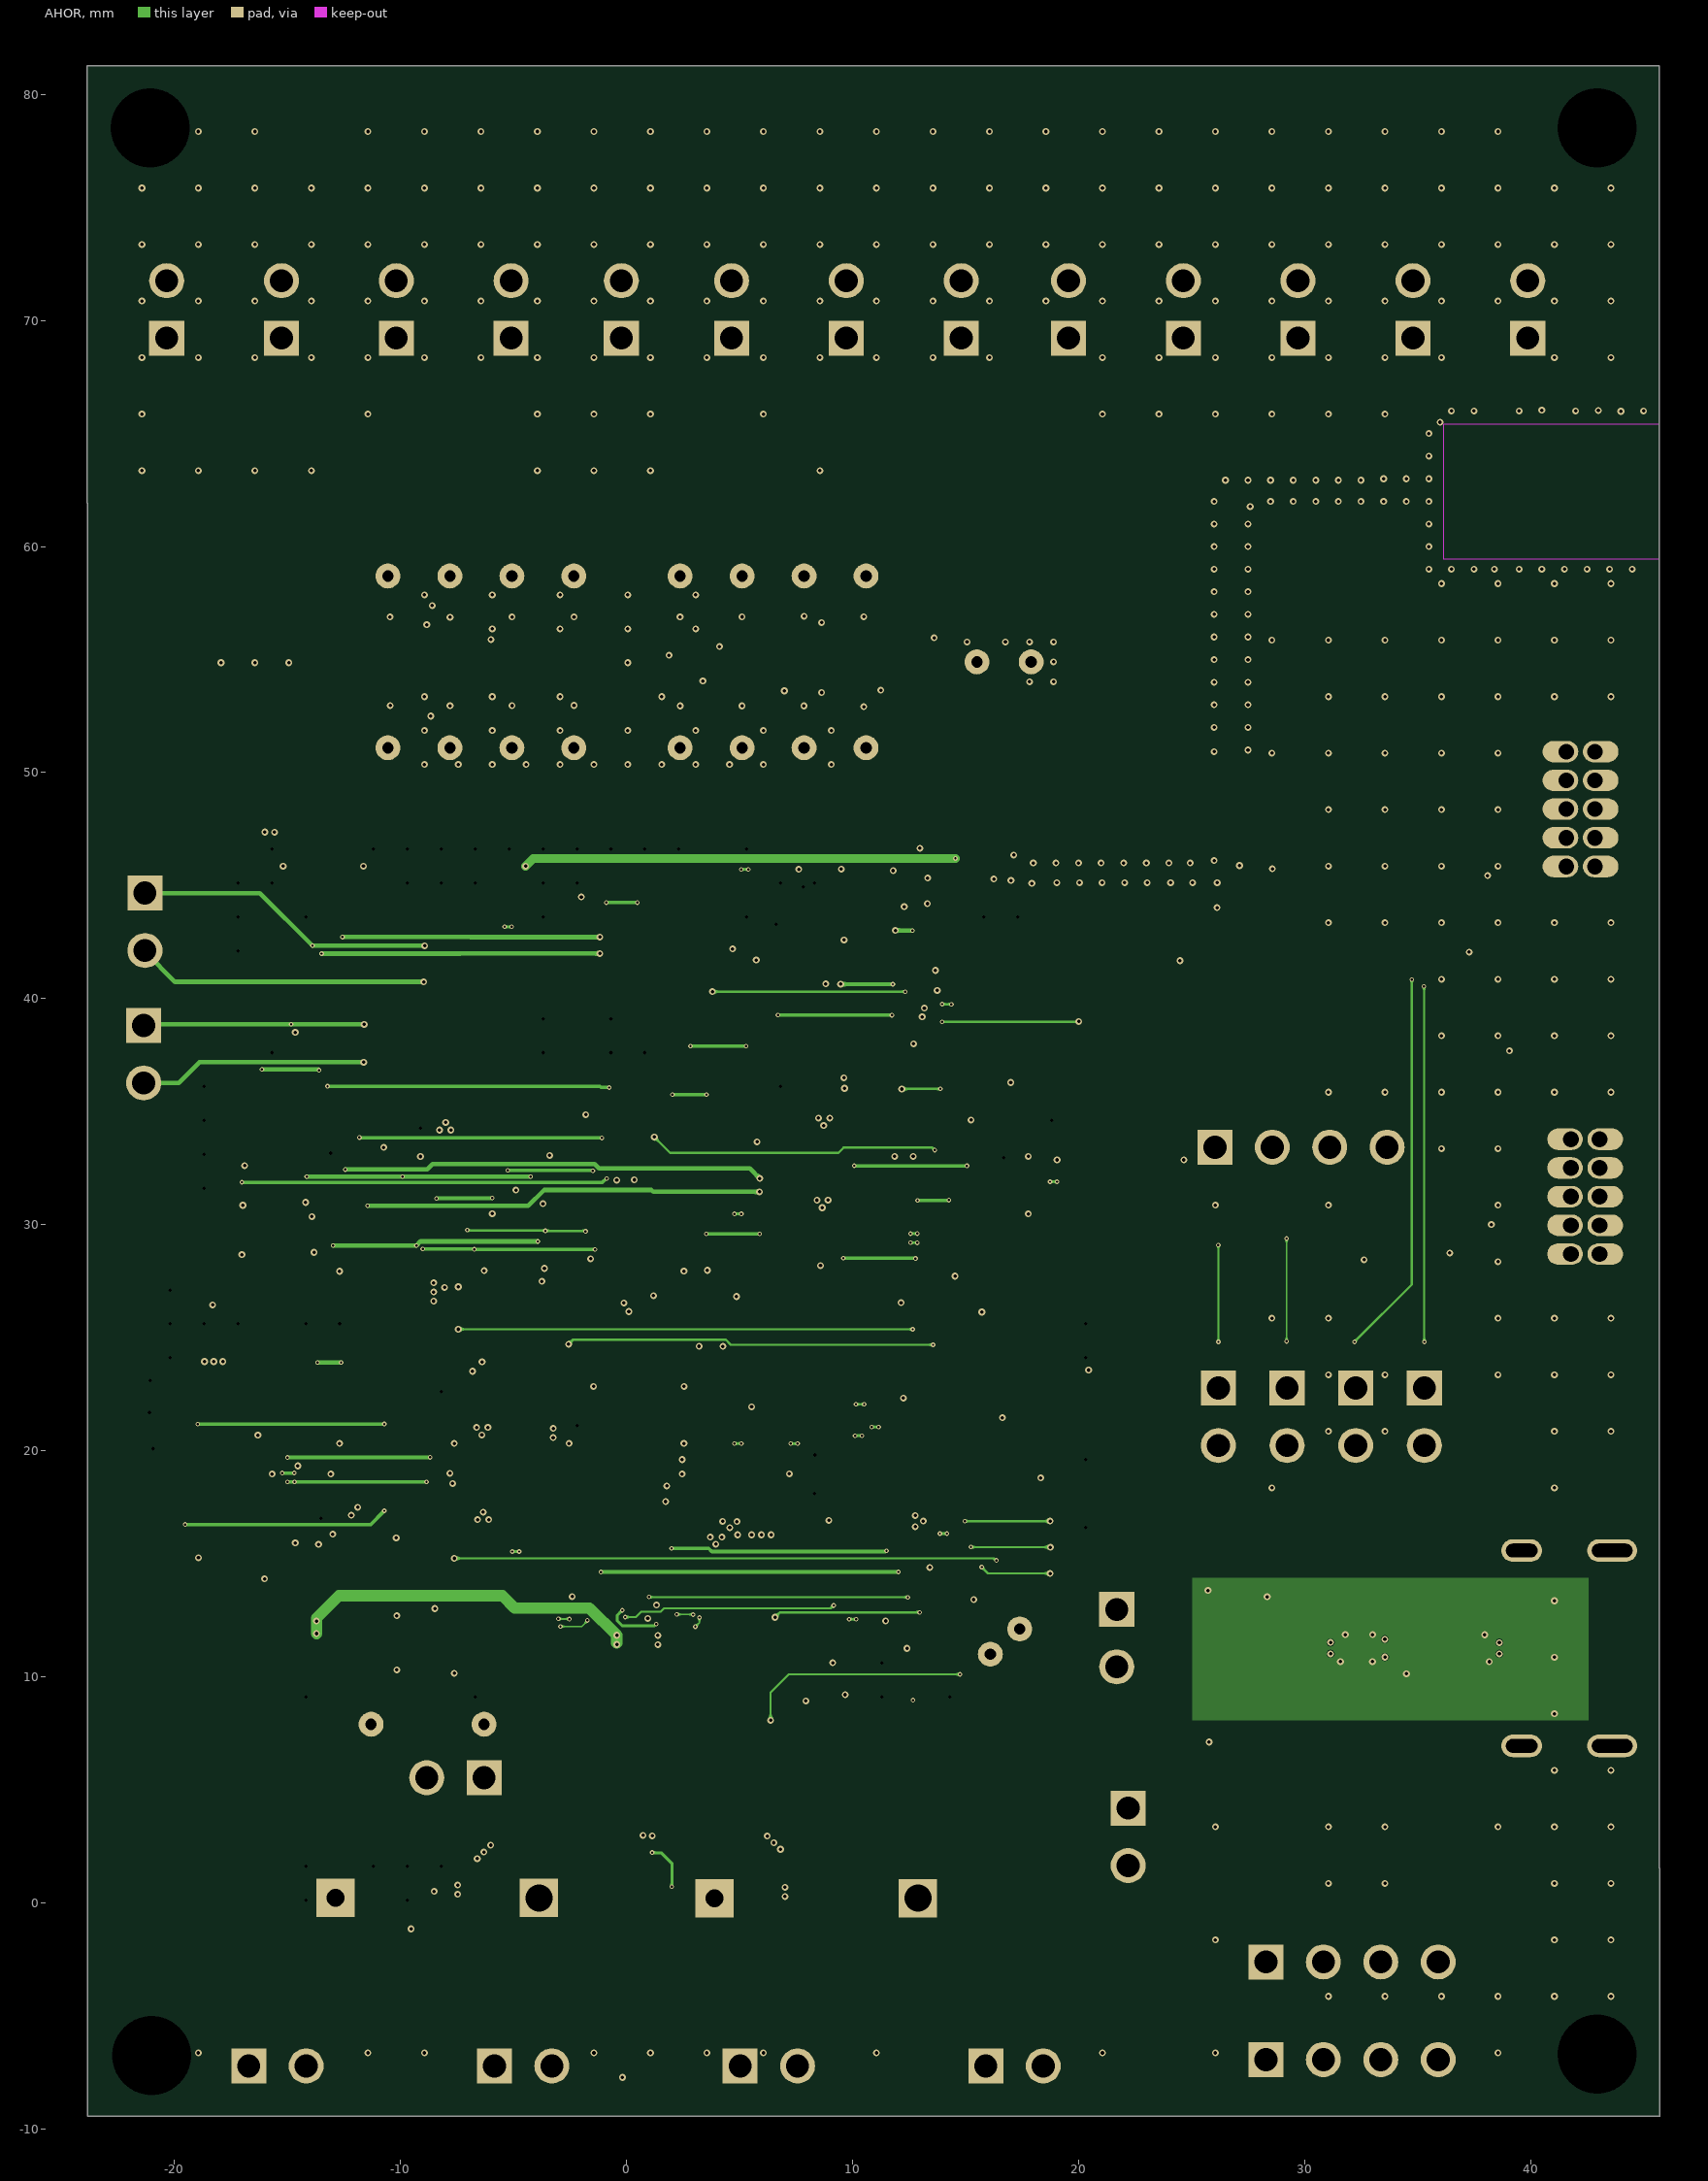
[diagram p9: AHOR]

## Layer stack, top to bottom
Top Solder: solder mask 0.038, LF-7013, Dk 3.5
Top Solder: solder mask 0.018, SM-004, Dk 4.1
TOP: signal copper 0.0175
Dielectric 1: prepreg 0.103, TU-768, Dk 3.7
DHOR: signal copper 0.035
Dielectric 2: core 0.065, TU-768, Dk 3.7
DVERT: signal copper 0.035
Dielectric 3: prepreg 0.13, TU-768, Dk 3.7
GND 1: signal copper 0.035
Dielectric 4: core 0.065, TU-768, Dk 4.1
POWER: signal copper 0.035
Dielectric 7: prepreg 0.13, TU-768, Dk 4.1
GND 2: signal copper 0.035
Dielectric 6: core 0.065, TU-768, Dk 3.7
GND 3: signal copper 0.035
Dielectric 8: prepreg 0.13, TU-768, Dk 3.7
AVERT: signal copper 0.035
Dielectric 9: core 0.065, TU-768, Dk 3.7
AHOR: signal copper 0.035
Dielectric 10: prepreg 0.13, TU-768, Dk 3.7
BOT: signal copper 0.0175
ThinFlex Bottom Coverlay: solder mask 0.018, SM-004, Dk 4.1
ThinFlex Bottom Coverlay: solder mask 0.038, LF-7013, Dk 3.5

## Board outline
-23.876,81.28 -23.867,61.925 -23.851,61.925 -23.851,-9.449 45.72,-9.449 45.72,1.524 45.697,1.524 45.697,81.28

## Design rules (kind name [scope] priority, off if disabled: settings)
AcuteAngle [All] p1: minimum=6.00000000000000E+0001 checktracksonly=TRUE
AssemblyTestPointUsage [All] p1 off:
AssemblyTestpoint [All] p1 off: testpointundercomponent=TRUE minsize=1.016 maxsize=2.54 preferedsize=1.524 minholesize=0 maxholesize=1.016 preferedholesize=0.813 testpointgrid=0.025 usegrid=TRUE gridtolerance=0 allowsidetop=TRUE allowsidebottom=TRUE
BoardOutlineClearance BoardOutlineClearance_PWR [OnLayer('POWER') AND IsPolygon] p1: gap=0.06 ignorepadtopadclearanceinfootprint=FALSE except(0.325: Poly-OutlineEdge Poly-CavityEdge Poly-CutoutEdge Poly-SplitContinuation)
BoardOutlineClearance [Not(OnLayer('Top Overlay')OR OnLayer('Bottom Overlay') or (IsPad and not InAnyNet))] p2: gap=0.06 ignorepadtopadclearanceinfootprint=FALSE except(0: Arc-SplitContinuation Track-SplitContinuation SMDPad-SplitContinuation THPad-SplitContinuation Via-SplitContinuation Fill-SplitContinuation Poly-SplitContinuation Region-SplitContinuation Text-SplitContinuation; 0.325: Poly-OutlineEdge Poly-CavityEdge Poly-CutoutEdge) // GSS_Standard
Clearance Clearance_drill [IsThruVia or IsBlindVia] p1: gap=0.094 ignorepadtopadclearanceinfootprint=TRUE
Clearance Clearance_ANT [InNetClass('50_OHM')] p2: gap=0.127 ignorepadtopadclearanceinfootprint=TRUE
Clearance Clearance_GSS_STD_3mil_underBGA [WithinRoom('BGA1','BGA2','BGA3','BGA4','BGA5','BGA6')] p3: gap=0.076 ignorepadtopadclearanceinfootprint=TRUE
Clearance Clearance_GSS_STD_3mil_NOTunderBGA [not WithinRoom('BGA1','BGA2','BGA3','BGA4','BGA5','BGA6')] p4: gap=0.076 ignorepadtopadclearanceinfootprint=TRUE // 18u (1/2oz) Cu
ComponentClearance [All] p1: gap=0.2 collisioncheckmode=3 verticalgap=0.254 showdistances=FALSE
DiffPairsRouting DiffPairsRouting_1 [InDifferentialPair('USB') And (OnLayer('BOT'))] p1: maxlimit=0.254 minlimit=0.208 mostfreqgap=0.254 toplayer_mingap=0.208 toplayer_maxgap=0.208 toplayer_prefgap=0.208 toplayer_minwidth=0.11 toplayer_maxwidth=0.2 toplayer_prefwidth=0.11 bottomlayer_mingap=0.208 bottomlayer_maxgap=0.208 bottomlayer_prefgap=0.208 bottomlayer_minwidth=0.097 bottomlayer_maxwidth=0.2 bottomlayer_prefwidth=0.2 impedanceprofiledriven=TRUE impedanceprofileid={1821BC03-67A2-4A2A-97A5-594607916CFC} impedanceprofilevalue=90.000000 maxuncoupledlength=12.7
FabricationTestPointUsage [All] p1 off: valid=0 allowmultiple=FALSE
FabricationTestpoint [All] p1 off: side=3 testpointundercomponent=TRUE minsize=1.016 maxsize=2.54 preferedsize=1.524 minholesize=0 maxholesize=1.016 preferedholesize=0.813 testpointgrid=0.025 allowsidetop=TRUE allowsidebottom=TRUE usegrid=TRUE gridtolerance=0
FanoutControl Fanout_Default [All] p1: bgadir=Out bgaviamode=Centered fanoutstyle=Auto fanoutdirection=Alternating viagrid=0.025 // Fanout_Default (Default Rule)
HoleSize [All] p1: absolutevalues=TRUE maxlimit=5 minlimit=0.07 maxpercent=80.000 minpercent=20.000
HoleToHoleClearance HoleToHoleClearance_Drilled [IsBlindVia or IsThruVia vs IsBlindVia or IsThruVia] p1: gap=0.25 allowstackedmicrovias=FALSE
HoleToHoleClearance [IsVia vs IsVia] p2: gap=0.203 allowstackedmicrovias=FALSE
MatchedLengths [InDifferentialPair('USB')] p1: tolerance=1 checknetsindiffpair=FALSE checkdiffpairvsdiffpair=TRUE checkxsignals=TRUE checkothers=TRUE targetsourcename="Not defined"
MaxMinImpedance "Schematic Impedance Constraint" [InNetClass('50_OHM')] p1: minimum=50.00 maximum=50.00
MaxMinImpedance [InNet('NetC59_1')] p2: minimum=50.00 maximum=50.00
MinimumSolderMaskSliver MinimumSolderMaskSliver_GSS_PERF [All] p1: minsoldermaskwidth=0.076
NetAntennae [not (WithinRoom('ENPANEL') or WithinRoom('POWERIN') or WithinRoom('THERM'))] p1: netantennaetolerance=0
PermittedLayers [All] p1: toplayerpermitted=TRUE bottomlayerpermitted=TRUE
PlaneClearance [IsPolygon] p1 off: clearance=0.076
PlaneConnect [All] p1 off: planeconnectstyle=Direct reliefexpansion=0.508 reliefentries=4 reliefconductorwidth=0.254 reliefairgap=0.254
PolygonConnect PolygonConnect_BAT [InNet('VBAT1R') or InNet('VBAT2R') or InNet('VGND1R') or InNet('VGND2R') vs InNet('VBAT1R') or InNet('VBAT2R') or InNet('VGND1R') or InNet('VGND2R')] p1: connectstyle=Direct reliefconductorwidth=0.254 reliefentries=4 polygonreliefangle="90 Angle" airgapwidth=0.254
PolygonConnect PolygonConnect_DCDC [InNetClass('DCDC_LOOP') AND not InComponent('U706')] p2: connectstyle=Direct reliefconductorwidth=0.254 reliefentries=4 polygonreliefangle="90 Angle" airgapwidth=0.254
PolygonConnect PolygonConnect_POWER_0201 [InNetClass('POWER')AND Not InNet('GND') AND (HasFootprint('C0201_C') OR HasFootprint('R0201_C'))] p3: thpad.connectstyle=Relief thpad.reliefconductorwidth=0.127 thpad.reliefentries=4 thpad.polygonreliefangle="90 Angle" thpad.airgapwidth=0.076 smdpad.connectstyle=Relief smdpad.reliefconductorwidth=0.127 smdpad.reliefentries=4 smdpad.polygonreliefangle="90 Angle" smdpad.airgapwidth=0.076 via.connectstyle=Direct via.reliefconductorwidth=0.127 via.reliefentries=4 via.polygonreliefangle="90 Angle" via.airgapwidth=0.076
PolygonConnect PolygonConnect_POWER [InNetClass('POWER')AND Not InNet('GND')] p4: thpad.connectstyle=Relief thpad.reliefconductorwidth=0.127 thpad.reliefentries=4 thpad.polygonreliefangle="90 Angle" thpad.airgapwidth=0.127 smdpad.connectstyle=Relief smdpad.reliefconductorwidth=0.127 smdpad.reliefentries=4 smdpad.polygonreliefangle="90 Angle" smdpad.airgapwidth=0.127 via.connectstyle=Direct via.reliefconductorwidth=0.127 via.reliefentries=4 via.polygonreliefangle="90 Angle" via.airgapwidth=0.127
PolygonConnect PolygonConnect_ANT [InNet('NetC200_*') OR InNet('NetC208_2') OR InNet('ANT+')] p5: connectstyle=Direct reliefconductorwidth=0.102 reliefentries=4 polygonreliefangle="90 Angle" airgapwidth=0.102
PolygonConnect [All] p6: thpad.connectstyle=Relief thpad.reliefconductorwidth=0.254 thpad.reliefentries=4 thpad.polygonreliefangle="90 Angle" thpad.airgapwidth=0.254 smdpad.connectstyle=Relief smdpad.reliefconductorwidth=0.127 smdpad.reliefentries=4 smdpad.polygonreliefangle="90 Angle" smdpad.airgapwidth=0.102 via.connectstyle=Direct via.reliefconductorwidth=0.102 via.reliefentries=4 via.polygonreliefangle="90 Angle" via.airgapwidth=0.102
RoomDefinition BGA1 [False] p1: confinementstyle=ConfineIn formatcopy=TRUE lockcomponents=FALSE outline 13.478,37.668 13.478,40.208 15.983,40.208 15.983,37.668
RoomDefinition BGA6 [False] p2: confinementstyle=ConfineIn formatcopy=TRUE lockcomponents=FALSE outline -16.2,17.8 -12.395,17.8 -12.395,20.2 -16.2,20.2
RoomDefinition BGA2 [False] p3: confinementstyle=ConfineIn formatcopy=TRUE lockcomponents=FALSE outline 11.467,28.935 13.267,28.935 13.267,31.074 11.467,31.074
RoomDefinition BGA5 [False] p4: confinementstyle=ConfineIn formatcopy=TRUE lockcomponents=FALSE outline 9.145,36.88 10.855,36.88 10.855,38.92 9.145,38.92
RoomDefinition BGA4 [False] p5: confinementstyle=ConfineIn formatcopy=TRUE lockcomponents=FALSE outline 9.6,18.8 9.6,25.8 16.6,25.8 16.6,18.8
RoutingCorners [All] p1 off: cornerstyle=45-Degree minsetback=2.54 maxsetback=2.54
RoutingVias RoutingVia [All] p1: holewidth=0.102 width=0.203 viastyle="Through Hole" minholewidth=0.102 minwidth=0.203 maxholewidth=0.254 maxwidth=0.508 viatemplateguid#1={6F137D39-EFB3-471D-AB9A-2024EF80A49C} viatemplatename#1=70u/200u
SMDEntry [All] p1: side=TRUE corner=TRUE anyangle=TRUE
SMDNeckDown [All] p1 off: percent=50.000
SilkToSilkClearance [All] p1 off: silktosilkclearance=0.127
SilkToSolderMaskClearance SilkscreenOverComponentPads [All] p1: minsilkscreentomaskgap=0.102 clearancetoexposedcopper=FALSE
SolderMaskExpansion SolderMaskExpansion_Via [IsVia] p1: expansion=0.102 istentingtop=TRUE
SolderMaskExpansion SolderMaskExpansion_GSS_LE_BGA [WithinRoom('BGA1','BGA2','BGA3','BGA4','BGA5')] p2: expansion=0.06 istentingtop=FALSE
SolderMaskExpansion SolderMaskExpansion_GSS_PERF [not IsVia] p3: expansion=0.075 istentingtop=FALSE
SolderMaskExpansion [All] p4: expansion=0.102 istentingtop=FALSE
SolderMaskExpansion SolderMaskExpansion_GSS_LE [All] p5 off: expansion=0.06 istentingtop=FALSE
SupplyNets "Schematic Supply Nets_9" [InNet('VLXSMPS')] p1: voltage=3.300
SupplyNets "Schematic Supply Nets_8" [InNet('CHG2_VCC')] p2: voltage=5.000
SupplyNets "Schematic Supply Nets_7" [InNet('CHG1_VCC')] p3: voltage=5.000
SupplyNets "Schematic Supply Nets_6" [InNet('ACC_VDD')] p4: voltage=3.300
SupplyNets "Schematic Supply Nets_4" [InNet('NetC410_1')] p5: voltage=3.300
SupplyNets "Schematic Supply Nets_3" [InNet('+VDD_BLE')] p6: voltage=3.300
SupplyNets "Schematic Supply Nets_2" [InNet('NetC409_2')] p7: voltage=3.300
SupplyNets "Schematic Supply Nets_1" [InNet('NetC408_2')] p8: voltage=3.300
SupplyNets "Schematic Supply Nets" [InNet('VDD11')] p9: voltage=3.300
SupplyNets "Schematic Supply Nets_50" [InNet('+VBUS')] p10: voltage=5.000
SupplyNets "Schematic Supply Nets_49" [InNet('+VCHG_RAIL')] p11: voltage=5.000
SupplyNets "Schematic Supply Nets_48" [InNet('+VDDS')] p12: voltage=3.300
SupplyNets "Schematic Supply Nets_47" [InNet('+DVDD')] p13: voltage=3.300
SupplyNets "Schematic Supply Nets_46" [InNet('+VDDA')] p14: voltage=3.300
SupplyNets "Schematic Supply Nets_45" [InNet('+VGND2R')] p15: voltage=0.000
SupplyNets "Schematic Supply Nets_44" [InNet('+VBAT2CHG')] p16: voltage=0.000
SupplyNets "Schematic Supply Nets_43" [InNet('+VCARR')] p17: voltage=0.000
SupplyNets "Schematic Supply Nets_42" [InNet('+VGND1R')] p18: voltage=0.000
SupplyNets "Schematic Supply Nets_41" [InNet('+VPP')] p19: voltage=0.000
SupplyNets "Schematic Supply Nets_40" [InNet('+VBAT1CHG')] p20: voltage=0.000
SupplyNets "Schematic Supply Nets_39" [InNet('+V_UNREG')] p21: voltage=0.000
SupplyNets "Schematic Supply Nets_38" [InNet('+VIMP_3V3')] p22: voltage=0.000
SupplyNets "Schematic Supply Nets_37" [InNet('+VBAT2F')] p23: voltage=0.000
SupplyNets "Schematic Supply Nets_36" [InNet('+HVOUT')] p24: voltage=0.000
SupplyNets "Schematic Supply Nets_35" [InNet('+HVIN')] p25: voltage=0.000
SupplyNets "Schematic Supply Nets_33" [InNet('+VBAT1SW')] p26: voltage=0.000
SupplyNets "Schematic Supply Nets_32" [InNet('+VBAT1R')] p27: voltage=0.000
SupplyNets "Schematic Supply Nets_31" [InNet('+VIMP_PP')] p28: voltage=0.000
SupplyNets "Schematic Supply Nets_30" [InNet('+VBAT2SW')] p29: voltage=0.000
SupplyNets "Schematic Supply Nets_29" [InNet('+VRECT')] p30: voltage=0.000
SupplyNets "Schematic Supply Nets_28" [InNet('+VBAT2R')] p31: voltage=0.000
SupplyNets "Schematic Supply Nets_27" [InNet('+VMAGNET')] p32: voltage=0.000
SupplyNets "Schematic Supply Nets_26" [InNet('+DCDC_IN')] p33: voltage=0.000
SupplyNets "Schematic Supply Nets_25" [InNet('+VBAT1F')] p34: voltage=0.000
SupplyNets "Schematic Supply Nets_15" [InNet('GND')] p35: voltage=0.000
UnConnectedPin [All] p1 off:
UnRoutedNet UnRoutedNet_1 [All] p1:
UnRoutedNet [All] p2: checkbadconnections=TRUE
Width Width_ANT_TOP_layer [OnLayer('TOP') and InNetClass('50_OHM')] p1: maxlimit=0.254 minlimit=0.076 preferedwidth=0.254 toplayer_minwidth=0.084 toplayer_maxwidth=0.084 toplayer_prefwidth=0.17 midlayer5_prefwidth=0.05 impedanceprofiledriven=TRUE impedanceprofileid={823FEB0B-B66F-45F3-9F92-E5AAAC55A20F} impedanceprofilevalue=50.000000 minimp=50.000000 maximp=50.000000 favimp=50.000000
Width Width_ANT_inner_layer [OnLayer('POWER') and InNetClass('50_OHM')] p2: maxlimit=0.076 minlimit=0.029 preferedwidth=0.071 toplayer_prefwidth=0.215 midlayer5_prefwidth=0.076 impedanceprofiledriven=TRUE impedanceprofileid={6B18A218-5760-4BF1-B6E5-0FB2CE448664} impedanceprofilevalue=50.000000 minimp=50.000000 maximp=50.000000 favimp=50.000000
Width Width_ANALOG [InNetClass('ANALOG')] p3: maxlimit=2 minlimit=0.102 preferedwidth=0.102
Width Width_GSS_STD_3mil [All] p4: maxlimit=10 minlimit=0.076 preferedwidth=0.127
9 further rules are at their usual default settings.

## Classes and differential pairs
net class DCDC_LOOP: +HVIN BST1_VCHG BST2_VCHG NetD700_2 SW1_VCHG SW2_VCHG
component class "Stim. CH Selection": C1500 C1501 C1502 C1503 C1504 C1505 C1506 C1507 C1508 C1509 C1510 C1511 C1512 C1513 C1514 C1515 C1516 C1517 C1518 C1519 C1520 C1521 R1500 R1501 R1502 R1503 R1504 R1505 R1506 R1507 R1508 TP1500 TP1501 TP1502 U1500 U1501 U1502 U1503 U1504 U1505 U1506 U1507
net class POWER: +DCDC_IN +DVDD +HVIN +HVOUT +V_UNREG +VBAT1CHG +VBAT1F +VBAT1R +VBAT1SW +VBAT2CHG +VBAT2F +VBAT2R +VBAT2SW +VCARR +VCHG_RAIL +VDD_BLE +VDDA +VDDS +VMAGNET +VPP +VRECT ACC_VDD BST1_VCHG BST2_VCHG CHG1_VCC CHG2_VCC COIL_PAD_1 COIL_PAD_2 NetC408_2 NetC409_2 NetC410_1 NetD600_2 NetD602_2 NetD700_2 NetR701_2 SW1_VCHG SW2_VCHG VDD11 VLXSMPS
net class DIGITAL: ACC.SCL ACC.SDA ACC_EN AMPL_RSTn BATT.MON_EN BATT.SW_EN BLE_P.1 BLE_P.2 BLE_PWRn BLE_RSTn BLE_SWDCLK BLE_SWDIO BLE_XL1 BLE_XL2 CB_EN CHG1.EN CHG1.OVP_ERRn CHG1.STATUS CHG2.EN CHG2.OVP_ERRn CHG2.STATUS CHG_RATE1 CHG_RATE2 DEBUG_UART_RX DEBUG_UART_TX ECG.HR_LOD ECG.HR_SDNn ECG.RLD ECG.RR_LOD ECG.RR_SDNn ENG1.LOD ENG1.SDNn ENG2.LOD ENG2.SDNn FRAM_EN HV_EN HVSW_EN I2C2.SCL I2C2.SDA IMP_EN IMP_ENn IMP_IN+_SEL IMP_IN-_SEL0 IMP_IN-_SEL1 IMP_IN-_SEL2 IPG_SHDN MAG_DET MUX_ENn NetC400_1 NetC403_1 PG_START PH1_EN PH2_EN SNK1 SNK2 SNK3 SNK4 SNK5 SPI1.BLE_CSn SPI1.FRAM_CSn SPI1.MISO SPI1.MOSI SPI1.SCK SRC1 SRC2 STIM_EN STIM_SEL.CH1n STIM_SEL.CH2n STIM_SEL.CH3n STIM_SEL.CH4n STIM_SEL.ENCLn STIMA_SELn STIMB_SELn SWCLK SWDIO SWO SYS_RSTn TEMP_EN USB_N USB_P VCHG_DISABLE VCHG_PGOOD VDDA_EN VDDS_EN VNSb_EN VPPSW_EN VRECT.DETn VRECT.MON_EN VRECT.OVPn XL_SCL XL_SDA
net class ANALOG: B1 B2 BASE_VCC1 BASE_VCC2 BATT.MON1 BATT.MON2 BATT_SW CH1 CH1_STIM_OR_SINK CH2 CH2_STIM_OR_SINK CH3 CH3_STIM_OR_SINK CH4 CH4_STIM_OR_SINK DAC1_VOUTA DAC1_VOUTB ECG.HR_OUT ECG.RR_OUT ECG_HR+ ECG_HR- ECG_RR+ ECG_RR- ENCL ENCL_STIM_OR_SINK ENG1+ ENG1- ENG1.OUT ENG2+ ENG2- ENG2.OUT HPF_1V5 IMP_OUT+ IMP_OUT- IREF1 IREF2 NetC904_2 NetC905_2 NetR1148_1 NetR1151_1 RC2_VC SINK_CH1 SINK_CH2 SINK_CH3 SINK_CH4 SINK_ENCL STIM1 STIM2 STIMA STIMB THERM.OFST THERM.OUT THERM.REF VBUFF_IN+ VBUFF_IN- VDAC1_BUF VDAC2_BUF VDACA VDACB VIMC_IN+ VIMC_IN- VRECT.MON
component class "Test Fixture": C1400 C1401 C1402 C1404 C1405 C1406 C1407 D1400 D1401 D1402 D1403 D1404 D1405 J1400 J1401 J1402 JP1400 JP1401 JP1402 JP1403 R1400 R1401 R1402 R1403 R1404 R1405 R1406 R1407 R1408 R1409 R1410 R1411 TP1402 TP1405 TP1406 U1400 U1401 U1402
component class Digital: C1300 C1301 C1302 J1300 Q1300 R1300 R1301 R1302 R1303 R1304 R1305 TP1300 TP1301 TP1302 U1300 U1301
component class WPT: C500 C501 C502 C503 C504 C505 C506 C507 C508 C509 C510 C511 C512 C513 C514 C515 C516 C517 D500 D501 D502 D503 D504 J500 J501 J504 J507 J508 L500 M500 M508 R500 R501 R502 R503 R504 R505 R506 R507 R508 R509 R510 R511 R512 R513 R514 R515 R516 R517 R518 R519 R520 R521 R522 R523 R524 TP500 TP501 TP502 TP503 TP504 TP505 TP506 TP507 TP508 TP509 TP510 TP511 TP512 TP513 TP514 TP515 U500 U501 U502 U503 U504 U505 U506 U507 U508
component class U_System: J200
component class "STM32 MCU": C300 C301 C302 C303 C304 C305 C306 C307 C308 C309 C310 C311 C312 C313 C314 C315 C316 C317 C318 C319 C320 L300 L301 R300 R301 R302 R303 TP300 TP301 TP302 TP303 TP304 TP305 U300 U301 Y300 Y301
component class Stimulation: C1100 C1102 C1103 C1109 C1112 C1114 C1115 C1117 Q1100 Q1101 Q1102 Q1103 Q1118 Q1119 R1100 R1101 R1102 R1103 R1104 R1105 R1108 R1148 R1149 R1150 R1151 R1152 R1153 TP1100 TP1101 TP1104 TP1105 TP1107 TP1108 TP1109 TP1110 TP1111 TP1112 TP1113 TP1114 TP1115 U1100 U1101 U1102 U1103 U1104 U1105 U1106
component class Sensing: C1000 C1001 C1002 C1003 C1004 C1005 C1006 C1007 C1008 C1009 C1010 C1011 C1012 C1013 C1014 C1015 C1016 C1017 C1018 C1019 C1020 C1021 C1022 C1023 C1024 C1025 C1026 C1027 C1028 C1029 D1000 D1001 D1002 D1003 D1004 D1005 D1006 D1007 D1008 D1009 D1010 D1011 D1012 D1013 D1014 D1015 R1000 R1001 R1002 R1003 R1004 R1005 R1006 R1007 R1008 R1009 R1010 R1011 R1012 R1013 R1014 R1015 R1016 R1017 R1018 R1019 R1020 R1021 R1022 R1023 R1024 R1025 R1026 R1027 R1028 R1029 R1030 R1031 R1032 R1033 R1034 R1035 R1036 R1037 R1038 R1039 R1040 R1041 R1042 R1043 R1044 R1045 R1046 R1047 R1048 R1049 R1050 R1051 R1052 R1053 R1054 R1055 R1056 R1057 R1058 R1059 R1060 R1061 TP1000 TP1001 TP1003 TP1004 TP1005 TP1006 TP1007 TP1008 TP1009 TP1010 TP1011 TP1012 TP1013 TP1014 TP1015 TP1016 TP1017 TP1018 TP1019 TP1020 TP1021 U1000 U1001 U1002 U1003
component class "Power Management": C700 C701 C702 C703 C704 C705 C706 C707 C708 C709 C710 C711 C712 C713 C714 D700 D703 L700 M701 R700 R701 R702 R703 R704 R705 R706 R707 R708 R709 R710 R711 R712 R713 SW700 TP700 TP701 TP702 TP703 TP704 TP705 TP706 TP707 TP708 TP709 TP710 TP711 TP712 TP713 TP714 U700 U701 U702 U703 U704 U705 U706 U707 U708 U709 U710
component class "Magnet Sensor": C800 C801 C802 D800 D801 M801 R800 R801 R803 R804 TP800 TP801 TP802 TP803 U800 U801 U802
component class IMC: C900 C901 C902 C903 C904 C905 C906 R900 R901 R902 R903 R906 R907 R908 R909 R910 R911 R912 R913 R914 R915 TP900 TP901 TP902 TP903 TP904 TP905 TP906 TP907 TP908 TP909 TP910 U900 U901 U902 U903 U904 U905 U906
component class Electrodes: C1200 C1201 C1202 C1203 C1204 C1205 C1206 C1207 C1208 C1209 C1210 C1211 C1212 C1213 C1214 C1215 D1200 D1201 D1202 D1203 D1204 D1205 D1206 D1207 D1208 D1209 D1210 D1211 D1212 D1213 D1214 D1215 D1216 J1200 J1201 J1202 J1203 J1204 J1205 J1206 J1207 J1208 J1209 J1210 J1211 J1212 J1213 J1214 J1215 J1216 J1217 J1218 J1219 J1220 J1221 J1222 J1223 J1224 J1225 J1226 J1229 J1230 J1233
component class 01-Cover: X100 X101 X102 X103 X104 X105 X106 X107 X108
component class BLE: BLE_SWDCLK C400 C401 C402 C403 C404 C405 C406 C407 C408 C409 C410 J400 J403 J404 J405 L400 L401 M400 R400 R403 TP400 TP401 TP402 TP403 TP404 TP405 TP406 U400 Y400 Y401
component class "Battery Management": C600 C601 C602 C603 C604 C605 C606 C607 D600 D601 D602 D603 D604 D605 D606 F600 F601 J600 J601 J602 J603 J604 J605 L600 L601 M622 R600 R601 R602 R603 R604 R605 R606 R607 R608 R609 R610 R611 R612 R613 R614 R615 R616 R617 R618 R619 R620 R621 R622 R623 R624 R625 R626 R627 R628 R629 R630 TP600 TP601 TP602 TP603 TP604 TP605 TP606 TP607 TP608 TP609 TP610 TP611 TP612 TP613 TP614 TP615 TP616 TP617 TP618 TP619 TP620 TP621 TP622 TP623 TP624 TP625 TP626 TP627 TP628 TP629 TP630 TP631 TP632 TP633 TP634 TP635 U600 U601 U602 U603 U604 U605 U606 U607 U608 U609 U610 U611 U612 U613 U614 U615 U616
net class 50_OHM: ANT+ NetA400_1 NetC401_2 NetJ404_1 UFL
differential pair USB: +USB_P -USB_N

## Components (designator, comment, footprint, x,y, rotation, side; value= is the part's Value field where it differs from the comment)
A400 "2450AT43B100E" ANTENNA_2450AT43B100E 40.919,62.357 r180 top
C300 "GRM0335C1E120JA01D" C0201_C 17.8,24.6 r180 top value=12pF
C301 "GRM0335C1E120JA01D" C0201_C 17.8,22 r180 top value=12pF
C302 "GRM188R61C475KE11" CAP0603_REDUCED#1 6.5,22.7 r90 top value=4.7uF
C303 "GRM188R61C475KE11" CAP0603_REDUCED#1 10.838,27.508 r0 top value=4.7uF
C304 "GRM033R61E104KE14J" C0201_C 17.78,31.699 r0 top value=100nF
C305 "GRM0335C1E120JA01D" C0201_C 19.2,21 r180 top value=12pF
C306 "GRM0335C1E120JA01D" C0201_C 19.2,19.4 r180 top value=12pF
C307 "GRM033R61E104KE14J" C0201_C 9.9,18.1 r0 top value=100nF
C308 "GRM033R61E104KE14J" C0201_C 11.5,18.1 r0 top value=100nF
C309 "GRM033R61E104KE14J" C0201_C 13,18.1 r0 top value=100nF
C310 "GRM033R61E104KE14J" C0201_C 8.9,21.5 r90 top value=100nF
C311 "GRM033R61E104KE14J" C0201_C 19.1,25.5 r180 top value=100nF
C312 "GRM033R61E104KE14J" C0201_C 14.326,26.492 r0 top value=100nF
C313 "GRM188R61C475KE11" CAP0603_REDUCED#1 15.724,15.922 r0 top value=4.7uF
C314 "GRM188R61C475KE11" CAP0603_REDUCED#1 15.724,17.124 r0 top value=4.7uF
C315 "GRM033R61E104KE14J" C0201_C 14.6,18.1 r0 top value=100nF
C316 "GRM033R61E104KE14J" C0201_C 8.9,20 r270 top value=100nF
C317 "GRM033R61C105ME15D" C0201_C 17.5,26.3 r0 top value=1uF
C318 "GRM033R61E104KE14J" C0201_C 17.5,25.5 r180 top value=100nF
C319 "GRM188R61C475KE11" CAP0603_REDUCED#1 7.8,22.7 r270 top value=4.7uF
C320 "GRM033R61E104KE14J" C0201_C 8.9,23 r90 top value=100nF
C400 "GRM0335C1E120JA01D" C0201_C 16.586,42.545 r0 top value=12pF
C401 "600L0R8AT200T" CAP0402_REDUCED 14.834,42.189 r180 top value=0.8pF
C402 "600L1R0AT200T" CAP0402_REDUCED 15.265,44.679 r180 top value=1pF
C403 "GRM0335C1E120JA01D" C0201_C 16.82,40.005 r0 top value=12pF
C404 "GRM033R61E104KE14J" C0201_C 13.053,36.556 r90 top value=100nF
C405 "GRM188R61C475KE11" CAP0603_REDUCED#1 17,35.617 r270 top value=4.7uF
C406 "GRM0335C1E120JA01D" C0201_C 14.253,35.436 r180 top value=12pF
C407 "GRM0335C1E120JA01D" C0201_C 15.653,35.436 r0 top value=12pF
C408 "GRM033R61E104KE14J" C0201_C 16.688,37.516 r90 top value=100nF
C409 "GRM033R71E101KA01D" C0201_C 16.82,39.319 r180 top value=100pF
C410 "GRM033R61C105ME15D" C0201_C 16.82,38.633 r0 top value=1uF
C500 "GRM2195C2A273GE01D" CAP0805_REDUCED -9.3,11.3 r180 top value=27nF
C501 "GRM2195C2A273GE01D" CAP0805_REDUCED -9.3,13 r180 top value=27nF
C502 "C0603C472F3GECTU" CAP0603_REDUCED#2 -9.3,9.6 r0 top value=4.7nF
C503 "C0603C472F3GECTU" CAP0603_REDUCED#2 -9.3,7.9 r0 top value=4.7nF
C504 "GCM21BC7YA475KE36L" CAP0805_REDUCED -14.5,10.5 r0 top value=4.7uF
C505 "GCM21BC7YA475KE36L" CAP0805_REDUCED -14.5,12.167 r0 top value=4.7uF
C506 "GCM155R71H223KA55D" CAP0402_REDUCED -2.171,16.535 r0 top value=0.022uF
C507 "GCM155R71H223KA55D" CAP0402_REDUCED -4.902,16.586 r0 top value=0.022uF
C508 "GRM188R61C475KE11" CAP0603_REDUCED#1 -0.636,15.704 r90 top value=4.7uF
C509 "GRM188R61C475KE11" CAP0603_REDUCED#1 -0.636,13.242 r270 top value=4.7uF
C510 "GRM033R61E104KE14J" C0201_C -1.632,13.737 r90 top value=100nF
C511 "GCM21BC7YA475KE36L" CAP0805_REDUCED -6.575,15.2 r270 top value=4.7uF
C512 "GRM188R61C475KE11" CAP0603_REDUCED#1 -7.112,11.709 r270 top value=4.7uF
C513 "GRM0335C1E330JA01D" C0201_C 17.755,13.437 r0 top value=33pF
C514 "GRM033R61E104KE14J" C0201_C -10.795,15.037 r270 top value=100nF
C515 "GRM033R61E104KE14J" C0201_C 17.45,18.085 r270 top value=100nF
C516 "GRM033R61E104KE14J" C0201_C 16.383,14.859 r0 top value=100nF
C517 "GRM033R61E104KE14J" C0201_C 16.383,14.122 r0 top value=100nF
C600 "GRM033R61C105ME15D" C0201_C 0,19.7 r0 top value=1uF
C601 "GRM033R61E104KE14J" C0201_C -0.305,24.105 r0 top value=100nF
C602 "GCM033R71E471KA03D" C0201_C 0.957,25.069 r180 top value=470pF
C603 "GRM033R61C105ME15D" C0201_C 3.8,19.7 r0 top value=1uF
C604 "GRM033R61E104KE14J" C0201_C 3.983,24.105 r0 top value=100nF
C605 "GCM033R71E471KA03D" C0201_C 5.186,25.069 r180 top value=470pF
C606 "GRM033R61E104KE14J" C0201_C 7.061,7.449 r0 top value=100nF
C607 "GRM033R61E104KE14J" C0201_C 10.211,11.414 r270 top value=100nF
C700 "GRM033R61E104KE14J" C0201_C 13.868,16.637 r180 top value=100nF
C701 "GRM188R61C475KE11" CAP0603_REDUCED#1 -19.7,21.7 r180 top value=4.7uF
C702 "GRM188R61C475KE11" CAP0603_REDUCED#1 -19.7,23.1 r180 top value=4.7uF
C703 "GCM21BC7YA475KE36L" CAP0805_REDUCED -11.6,25.5 r90 top value=4.7uF
C704 "GCM21BC7YA475KE36L" CAP0805_REDUCED -9.9,25.5 r90 top value=4.7uF
C705 "GRM188R61C475KE11" CAP0603_REDUCED#1 9.881,14.757 r270 top value=4.7uF
C706 "GRM033R61E104KE14J" C0201_C 10.947,15.037 r90 top value=100nF
C707 "GRM033R61E104KE14J" C0201_C -6.833,17.774 r0 top value=100nF
C708 "GRM033R61E104KE14J" C0201_C -6.825,20.211 r0 top value=100nF
C709 "GRM033R61E104KE14J" C0201_C 4.999,13.899 r90 top value=100nF
C710 "GRM033R61E104KE14J" C0201_C 8.23,31.613 r0 top value=100nF
C711 "GRM033R61E104KE14J" C0201_C 8.23,33.813 r0 top value=100nF
C712 "GRM033R61E104KE14J" C0201_C 19.334,22.096 r0 top value=100nF
C713 "GRM033R61E104KE14J" C0201_C -13.64,21.844 r0 top value=100nF
C714 "GRM033R61C105ME15D" C0201_C -13.64,22.53 r0 top value=1uF
C800 "ZRB15XR61A106ME01D" CAP0402_REDUCED 11.989,11.913 r180 top value=10uF
C801 "GRM033R61E104KE14J" C0201_C 13.741,15.265 r180 top value=100nF
C802 "ZRB15XR61A106ME01D" CAP0402_REDUCED 15.367,12.548 r90 top value=10uF
C900 "GRM033R61E104KE14J" C0201_C -4.649,26.523 r180 top value=100nF
C901 "GRM033R61E104KE14J" C0201_C -6.782,22.86 r90 top value=100nF
C902 "GRM033R61E104KE14J" C0201_C -4.623,29.668 r90 top value=100nF
C903 "GRM033R61E104KE14J" C0201_C -2.134,34.239 r0 top value=100nF
C904 "GRM033R61E104KE14J" C0201_C -5.944,28.275 r90 top value=100nF
C905 "GRM033R61E104KE14J" C0201_C -4.928,28.575 r180 top value=100nF
C906 "GRM033R61E104KE14J" C0201_C -1.245,29.489 r270 top value=100nF
C1000 "GRM033R60J155ME14D" C0201_C 3.581,28.861 r90 top value=1.5uF
C1001 "GRM033R61C183KE84D" C0201_C 1.733,36.299 r270 top value=18nF
C1002 "CGA2B1X7S1C334K050BC" CAP0402_REDUCED 14.367,30.904 r180 top value=0.33uF
C1003 "GRM033R61E104KE14J" C0201_C 2.818,28.897 r90 top value=100nF
C1004 "GRM033R61E104KE14J" C0201_C 0.864,28.861 r90 top value=100nF
C1005 "GRM033R61E104KE14J" C0201_C 9.169,29.947 r0 top value=100nF
C1006 "GRM033R61E104KE14J" C0201_C 10.667,29.304 r0 top value=100nF
C1007 "GRM033R61C183KE84D" C0201_C 4.955,30.31 r270 top value=18nF
C1008 "CGA2B1X7S1C334K050BC" CAP0402_REDUCED 9.767,33.704 r270 top value=0.33uF
C1009 "GRM033R71E102KA01J" C0201_C 4.96,33.68 r270 top value=1nF
C1010 "GRM033R71E102KA01J" C0201_C 14.567,32.204 r270 top value=1nF
C1011 "GRM0335C1E330JA01D" C0201_C 0.301,35 r270 top value=33pF
C1012 "GCM155R71H152KA37D" CAP0402_REDUCED 14.122,27.711 r180 top value=1500pF
C1013 "GRM033R71E102KA01J" C0201_C 14.267,30.104 r180 top value=1nF
C1014 "GRM033R71E331KA01D" C0201_C 3.404,35 r270 top value=330pF
C1015 "GRM033R60J155ME14D" C0201_C 2.286,45.314 r270 top value=1.5uF
C1016 "GRM033R61C183KE84D" C0201_C 0.8,39 r270 top value=18nF
C1017 "GRM188Z71C225ME43J" CAP0603_REDUCED#1 12.649,40.996 r270 top value=2.2uF
C1018 "GRM033R61E104KE14J" C0201_C 3.3,46.6 r0 top value=100nF
C1019 "GRM033R61E104KE14J" C0201_C 7.8,37.57 r90 top value=100nF
C1020 "GRM033R61E104KE14J" C0201_C 8.572,37.17 r90 top value=100nF
C1021 "GRM033R61E104KE14J" C0201_C 4.4,45.3 r90 top value=100nF
C1022 "GRM033R61C183KE84D" C0201_C -0.4,45.3 r90 top value=18nF
C1023 "GRM188Z71C225ME43J" CAP0603_REDUCED#1 7,40.9 r270 top value=2.2uF
C1024 "GRM033R71E102KA01J" C0201_C -0.5,40.2 r0 top value=1nF
C1025 "GRM033R71E102KA01J" C0201_C 11.5,39.851 r270 top value=1nF
C1026 "GRM033R61E104KE14J" C0201_C 11.9,35.6 r180 top value=100nF
C1027 "GRM0335C1E330JA01D" C0201_C 5.6,38.97 r90 top value=33pF
C1028 "GRM033R61E104KE14J" C0201_C 11.9,38 r180 top value=100nF
C1029 "GRM033R71E331KA01D" C0201_C 1.6,39 r90 top value=330pF
C1100 "GRM033R61E104KE14J" C0201_C -16.703,16.697 r0 top value=100nF
C1102 "GRM033R61E104KE14J" C0201_C -13.737,17.43 r180 top value=100nF
C1103 "GRM033R61C224KE14D" C0201_C -11.7,18.7 r0 top value=220nF
C1109 "GRM033R61E104KE14J" C0201_C -20.4,19.8 r90 top value=100nF
C1112 "GRM033R61E104KE14J" C0201_C -10.49,18.694 r0 top value=100nF
C1114 "GRM033R61E104KE14J" C0201_C -15.327,20.652 r180 top value=100nF
C1115 "GRM033R61E104KE14J" C0201_C -16.703,17.374 r0 top value=100nF
C1117 "GRM033R61E104KE14J" C0201_C -14.036,20.652 r180 top value=100nF
C1200 "GRT0335C1E680JA02D" C0201_C 13.614,54.908 r270 top value=68pF
C1201 "C1005C0G2A681J050BE" CAP0402_REDUCED -10.038,56.335 r180 top value=680pF
C1202 "C1005C0G2A681J050BE" CAP0402_REDUCED 1.93,56.337 r0 top value=680pF
C1203 "C1005C0G2A681J050BE" CAP0402_REDUCED -10.038,53.505 r180 top value=680pF
C1204 "C1005C0G2A681J050BE" CAP0402_REDUCED -4.648,56.335 r180 top value=680pF
C1205 "C1005C0G2A681J050BE" CAP0402_REDUCED 4.684,56.346 r0 top value=680pF
C1206 "C1005C0G2A681J050BE" CAP0402_REDUCED -7.388,53.505 r180 top value=680pF
C1207 "C1005C0G2A681J050BE" CAP0402_REDUCED -7.388,56.335 r180 top value=680pF
C1208 "C1005C0G2A681J050BE" CAP0402_REDUCED 7.419,56.363 r0 top value=680pF
C1209 "C1005C0G2A681J050BE" CAP0402_REDUCED -4.648,53.505 r180 top value=680pF
C1210 "C1005C0G2A681J050BE" CAP0402_REDUCED 4.684,53.467 r0 top value=680pF
C1211 "C1005C0G2A681J050BE" CAP0402_REDUCED -1.909,56.335 r180 top value=680pF
C1212 "C1005C0G2A681J050BE" CAP0402_REDUCED 10.067,56.337 r0 top value=680pF
C1213 "C1005C0G2A681J050BE" CAP0402_REDUCED -1.909,53.505 r180 top value=680pF
C1214 "C1005C0G2A681J050BE" CAP0402_REDUCED 10.067,53.467 r0 top value=680pF
C1215 "GRT0335C1E680JA02D" C0201_C 14.393,54.908 r270 top value=68pF
C1300 "GRM033R61E104KE14J" C0201_C 7.112,43.358 r270 top value=100nF
C1301 "GRM033R61C105ME15D" C0201_C 11.5,43.3 r270 top value=1uF
C1302 "GRM033R61E104KE14J" C0201_C 8.103,44.399 r0 top value=100nF
C1400 "GRM188R61C475KE11" CAP0603_REDUCED#1 35.23,14.63 r0 top value=4.7uF
C1401 "GRM033R61E104KE14J" C0201_C 37.006,12.963 r180 top value=100nF
C1402 "GRM033R61C105ME15D" C0201_C 32.106,13.386 r270 top value=1uF
C1404 "GRM033R61C105ME15D" C0201_C 36.652,2.184 r0 top value=1uF
C1405 "GRM033R61E104KE14J" C0201_C 35.281,3.83 r90 top value=100nF
C1406 "GRM033R61C105ME15D" C0201_C 29.108,2.159 r180 top value=1uF
C1407 "GRM033R61E104KE14J" C0201_C 27.653,3.83 r90 top value=100nF
C1500 "GRM033R61E104KE14J" C0201_C -7.415,30.404 r0 top value=100nF
C1501 "GRM033R61E104KE14J" C0201_C -17.582,31.267 r0 top value=100nF
C1502 "GRM188C61E226ME01J" C0603 -4.463,45.06 r90 top value=22uF
C1503 "GRM188C61E226ME01J" C0603 -4.463,37.998 r90 top value=22uF
C1504 "GRM188C61E226ME01J" C0603 -8.045,45.06 r270 top value=22uF
C1505 "GRM188C61E226ME01J" C0603 -8.94,41.529 r270 top value=22uF
C1506 "GRM188C61E226ME01J" C0603 -5.358,41.529 r90 top value=22uF
C1507 "GRM188C61E226ME01J" C0603 -6.254,45.06 r270 top value=22uF
C1508 "GRM188C61E226ME01J" C0603 -11.627,37.998 r270 top value=22uF
C1509 "GRM188C61E226ME01J" C0603 -9.836,37.998 r270 top value=22uF
C1510 "GRM188C61E226ME01J" C0603 -8.045,37.998 r270 top value=22uF
C1511 "GRM188C61E226ME01J" C0603 -11.627,45.06 r270 top value=22uF
C1512 "GRM188C61E226ME01J" C0603 -10.731,41.529 r270 top value=22uF
C1513 "GRM188C61E226ME01J" C0603 -12.522,41.529 r270 top value=22uF
C1514 "GRM188C61E226ME01J" C0603 -16.104,41.529 r270 top value=22uF
C1515 "GRM188C61E226ME01J" C0603 -14.313,41.529 r270 top value=22uF
C1516 "GRM188C61E226ME01J" C0603 -15.209,45.06 r270 top value=22uF
C1517 "GRM188C61E226ME01J" C0603 -2.672,37.998 r270 top value=22uF
C1518 "GRM188C61E226ME01J" C0603 -7.149,41.529 r270 top value=22uF
C1519 "GRM188C61E226ME01J" C0603 -6.254,37.998 r270 top value=22uF
C1520 "GRM188C61E226ME01J" C0603 -9.836,45.06 r270 top value=22uF
C1521 "GRM188C61E226ME01J" C0603 -13.418,45.06 r270 top value=22uF
D301 "LTST-C190AKT" LEDC0603 22.25,18.923 r90 top value="AMBER LED"
D401 "LTST-C190AKT" LEDC0603 42.951,54.458 r180 top value="AMBER LED"
D402 "" LEDC0603 19.964,35.904 r90 top value="BLUE LED"
D500 "GSBT0540X" STM_SOD-523_R -12,11.3 r0 top
D501 "GSBT0540X" STM_SOD-523_R -12,10.2 r0 top
D502 "MM5Z22VT5G" SODFL1608X70N -12.624,13.487 r0 top
D503 "GSBT0540X" STM_SOD-523_R -12,12.4 r180 top
D504 "GSBT0540X" STM_SOD-523_R -12,9.1 r180 top
D600 "GSBT0540X" STM_SOD-523_R -2.413,21.666 r0 top
D601 "NSR0130P2T5G" ONSC_SOD-923_CASE514AB -3.861,1.803 r0 top
D602 "GSBT0540X" STM_SOD-523_R 2.057,21.565 r90 top
D603 "NSR0130P2T5G" ONSC_SOD-923_CASE514AB 4.183,2.344 r180 top
D604 "NSR0130P2T5G" ONSC_SOD-923_CASE514AB -1.372,0.279 r180 top
D605 "NSR0130P2T5G" ONSC_SOD-923_CASE514AB 8.661,8.439 r90 top
D606 "NSR0130P2T5G" ONSC_SOD-923_CASE514AB 6.73,11.319 r270 top
D700 "GSBT0540X" STM_SOD-523_R -13.7,24.5 r180 top
D703 "GSBT0540X" STM_SOD-523_R 1.257,14.986 r90 top
D704 "LTST-C191TGKT" LEDC0603 12.573,7.645 r180 top value="GREEN LED"
D705 "LTST-C190KRKT" LEDC0603 -22.25,28.448 r270 top value="RED LED"
D800 "NSR0130P2T5G" ONSC_SOD-923_CASE514AB 12.153,14.3 r0 top
D801 "NSR0130P2T5G" ONSC_SOD-923_CASE514AB 12.153,15.392 r0 top
D802 "LTST-C191KSKT" LEDC0603 17.526,7.645 r0 top value="YELLOW LED"
D1000 "BAS116LS-QYL" BAS116LSQYL 5.777,30.213 r90 top
D1001 "BAS116LS-QYL" BAS116LSQYL 5.775,33.318 r270 top
D1002 "BAS116LS-QYL" BAS116LSQYL 10.967,32.254 r90 top
D1003 "BAS116LS-QYL" BAS116LSQYL 13.567,32.254 r90 top
D1004 "BAS116LS-QYL" BAS116LSQYL 6.749,30.208 r270 top
D1005 "BAS116LS-QYL" BAS116LSQYL 6.742,33.319 r90 top
D1006 "BAS116LS-QYL" BAS116LSQYL 10.967,34.104 r90 top
D1007 "BAS116LS-QYL" BAS116LSQYL 13.567,34.104 r90 top
D1008 "BAS116LS-QYL" BAS116LSQYL -0.6,43.8 r180 top
D1009 "BAS116LS-QYL" BAS116LSQYL -0.6,41.1 r180 top
D1010 "BAS116LS-QYL" BAS116LSQYL 10.6,39.9 r90 top
D1011 "BAS116LS-QYL" BAS116LSQYL 8.2,39.9 r90 top
D1012 "BAS116LS-QYL" BAS116LSQYL -2.411,43.8 r180 top
D1013 "BAS116LS-QYL" BAS116LSQYL -2.411,41.1 r180 top
D1014 "BAS116LS-QYL" BAS116LSQYL 8.2,41.73 r90 top
D1015 "BAS116LS-QYL" BAS116LSQYL 10.6,41.73 r90 top
D1200 "PESD5V0S1BLD,315" PESD5V0S1BLD315 12.624,54.889 r270 top
D1201 "PESD5V0S1BLD,315" PESD5V0S1BLD315 -10.104,57.472 r180 top
D1202 "PESD5V0S1BLD,315" PESD5V0S1BLD315 2.013,57.47 r0 top
D1203 "PESD5V0S1BLD,315" PESD5V0S1BLD315 -10.104,52.345 r180 top
D1204 "PESD5V0S1BLD,315" PESD5V0S1BLD315 2.013,52.345 r0 top
D1205 "PESD5V0S1BLD,315" PESD5V0S1BLD315 -4.715,57.472 r180 top
D1206 "PESD5V0S1BLD,315" PESD5V0S1BLD315 4.762,57.47 r0 top
D1207 "PESD5V0S1BLD,315" PESD5V0S1BLD315 -7.459,52.345 r180 top
D1208 "PESD5V0S1BLD,315" PESD5V0S1BLD315 7.512,52.345 r0 top
D1209 "PESD5V0S1BLD,315" PESD5V0S1BLD315 -7.459,57.472 r180 top
D1210 "PESD5V0S1BLD,315" PESD5V0S1BLD315 7.512,57.47 r0 top
D1211 "PESD5V0S1BLD,315" PESD5V0S1BLD315 -4.715,52.345 r180 top
D1212 "PESD5V0S1BLD,315" PESD5V0S1BLD315 4.762,52.345 r0 top
D1213 "PESD5V0S1BLD,315" PESD5V0S1BLD315 -1.971,57.472 r180 top
D1214 "PESD5V0S1BLD,315" PESD5V0S1BLD315 10.152,57.472 r0 top
D1215 "PESD5V0S1BLD,315" PESD5V0S1BLD315 -1.971,52.345 r180 top
D1216 "PESD5V0S1BLD,315" PESD5V0S1BLD315 10.152,52.345 r0 top
D1400 "LTST-C191TGKT" LEDC0603 39.106,19.392 r270 top value="GREEN LED"
D1401 "" LEDC0603 39.056,-2.536 r90 top value=DNP
D1402 "" LEDC0603 25.156,-2.536 r90 top value=DNP
D1403 "IP4220CZ6F" FP-SOT457-IPC_A 34.506,11.263 r90 top
D1404 "LTST-C191TGKT" LEDC0603 28.956,15.773 r90 top value="GREEN LED"
D1405 "LTST-C190AKT" LEDC0603 26.568,15.773 r90 top value="AMBER LED"
F600 "0440.750WR" LITTELFUSE_440series_1206_REDUCED -9.881,0.229 r0 top value=750mA
F601 "0440.750WR" LITTELFUSE_440series_1206_REDUCED 6.864,0.215 r0 top value=750mA
J200 "THPAD_20m" FEEDHOLE_20mil 17.905,54.897 r270 top value="FT pad"
J301 "FTSH-105-01-F-D-K" SAMTEC_FTSH-105-01-XXX-D-K 42.418,31.242 r90 top
J400 "FTSH-105-01-F-D-K" SAMTEC_FTSH-105-01-XXX-D-K 42.215,48.387 r90 top
J403 "U.FL-R-SMT-1(10)" FP-U_FL-R-SMT-1_10-MFG 26.822,49.022 r0 top
J404 "U.FL-R-SMT-1(10)" FP-U_FL-R-SMT-1_10-MFG 32.563,37.922 r180 top
J405 "U.FL-R-SMT-1(10)" FP-U_FL-R-SMT-1_10-MFG 32.563,57.612 r0 top
J500 "Coil Pad - 20mil" FEEDHOLE_20mil -6.3,7.9 r270 top value="Coil Solder Pad"
J501 "Coil Pad - 20mil" FEEDHOLE_20mil -11.3,7.9 r270 top value="Coil Solder Pad"
J502 "TSW-102-26-G-S" SMTC-TSW-102-26-XX-S -6.299,5.537 r180 top
J503 "TSW-102-26-G-S" SMTC-TSW-102-26-XX-S 22.2,4.191 r270 top
J504 "TSW-102-26-G-S" SMTC-TSW-102-26-XX-S -16.713,-7.214 r0 top
J505 "TSW-102-26-G-S" SMTC-TSW-102-26-XX-S 15.9,-7.214 r0 top
J506 "TSW-102-26-G-S" SMTC-TSW-102-26-XX-S 21.692,12.979 r270 top
J507 "Coil Pad - 20mil" FEEDHOLE_20mil 17.399,12.116 r255 top value="Coil Solder Pad" (schematic designator J502)
J508 "Coil Pad - 20mil" FEEDHOLE_20mil 16.1,11 r0 top value="Coil Solder Pad" (schematic designator J503)
J600 "Positive_Battery_PTH" Positive_Battery_PTH -3.875,0.221 r180 top value="Positive Terminal"
J601 "Negative_Battery_PTH" Negative_Battery_PTH -12.879,0.221 r180 top value="Negative Terminal"
J602 "TSW-102-26-G-S" SMTC-TSW-102-26-XX-S -5.842,-7.214 r0 top
J603 "Positive_Battery_PTH" Positive_Battery_PTH 12.898,0.203 r180 top value="Positive Terminal"
J604 "Negative_Battery_PTH" Negative_Battery_PTH 3.894,0.203 r180 top value="Negative Terminal"
J605 "TSW-102-26-G-S" SMTC-TSW-102-26-XX-S 5.029,-7.214 r0 top
J1200 "THPAD_20m" FEEDHOLE_20mil 15.505,54.897 r90 top value="FT pad"
J1201 "THPAD_20m" FEEDHOLE_20mil -10.558,58.697 r90 top value="FT pad"
J1202 "THPAD_20m" FEEDHOLE_20mil 2.371,58.697 r90 top value="FT pad"
J1203 "TSW-102-26-G-S" SMTC-TSW-102-26-XX-S 39.878,69.222 r90 top
J1204 "THPAD_20m" FEEDHOLE_20mil -10.558,51.097 r90 top value="FT pad"
J1205 "THPAD_20m" FEEDHOLE_20mil 2.371,51.097 r90 top value="FT pad"
J1206 "THPAD_20m" FEEDHOLE_20mil -5.072,58.697 r90 top value="FT pad"
J1207 "THPAD_20m" FEEDHOLE_20mil 5.114,58.697 r90 top value="FT pad"
J1208 "THPAD_20m" FEEDHOLE_20mil -7.815,51.097 r90 top value="FT pad"
J1209 "THPAD_20m" FEEDHOLE_20mil 7.857,51.097 r90 top value="FT pad"
J1210 "THPAD_20m" FEEDHOLE_20mil -7.815,58.697 r90 top value="FT pad"
J1211 "THPAD_20m" FEEDHOLE_20mil 7.857,58.697 r90 top value="FT pad"
J1212 "THPAD_20m" FEEDHOLE_20mil -5.072,51.097 r90 top value="FT pad"
J1213 "THPAD_20m" FEEDHOLE_20mil 5.114,51.097 r90 top value="FT pad"
J1214 "THPAD_20m" FEEDHOLE_20mil -2.329,58.697 r90 top value="FT pad"
J1215 "THPAD_20m" FEEDHOLE_20mil 10.6,58.697 r90 top value="FT pad"
J1216 "THPAD_20m" FEEDHOLE_20mil -2.329,51.097 r90 top value="FT pad"
J1217 "THPAD_20m" FEEDHOLE_20mil 10.6,51.097 r90 top value="FT pad"
J1218 "TSW-102-26-G-S" SMTC-TSW-102-26-XX-S -20.345,69.222 r90 top
J1219 "TSW-102-26-G-S" SMTC-TSW-102-26-XX-S -0.229,69.222 r90 top
J1220 "TSW-102-26-G-S" SMTC-TSW-102-26-XX-S 9.728,69.222 r90 top
J1221 "TSW-102-26-G-S" SMTC-TSW-102-26-XX-S 19.558,69.222 r90 top
J1222 "TSW-102-26-G-S" SMTC-TSW-102-26-XX-S -15.265,69.222 r90 top
J1223 "TSW-102-26-G-S" SMTC-TSW-102-26-XX-S 4.648,69.222 r90 top
J1224 "TSW-102-26-G-S" SMTC-TSW-102-26-XX-S 14.808,69.222 r90 top
J1225 "TSW-102-26-G-S" SMTC-TSW-102-26-XX-S 29.707,69.222 r90 top
J1226 "TSW-102-26-G-S" SMTC-TSW-102-26-XX-S -10.185,69.222 r90 top
J1229 "TSW-102-26-G-S" SMTC-TSW-102-26-XX-S 24.638,69.222 r90 top
J1230 "TSW-102-26-G-S" SMTC-TSW-102-26-XX-S -5.105,69.222 r90 top
J1233 "TSW-102-26-G-S" SMTC-TSW-102-26-XX-S 34.798,69.222 r90 top
J1300 "TSW-104-07-G-S" SMTC-TSW-104-07-X-S 26.035,33.43 r0 top
J1400 "217179-0001" 217179-0001 42.306,11.263 r90 top locked
J1401 "TSW-104-07-G-S" SMTC-TSW-104-07-X-S 28.296,-2.616 r0 top
J1402 "TSW-104-07-G-S" SMTC-TSW-104-07-X-S 28.296,-6.934 r0 top
JP1400 "TSW-102-26-G-S" SMTC-TSW-102-26-XX-S 29.227,22.771 r270 top
JP1401 "TSW-102-26-G-S" SMTC-TSW-102-26-XX-S 32.266,22.771 r270 top
JP1402 "TSW-102-26-G-S" SMTC-TSW-102-26-XX-S 26.187,22.771 r270 top
JP1403 "TSW-102-26-G-S" SMTC-TSW-102-26-XX-S 35.306,22.771 r270 top
JP1501 "TSW-102-26-G-S" SMTC-TSW-102-26-XX-S -21.307,44.671 r270 top
JP1502 "TSW-102-26-G-S" SMTC-TSW-102-26-XX-S -21.361,38.811 r270 top
L300 "VLS252010HBX-2R2M-1" TDK_VLS252010HBX-1 7.912,25.502 r90 top value=2.2uH
L301 "LQG15HS33NJ02D" L0402_C 17.6,27.1 r180 top value=33nH
L400 "LQW15AN3N9G80D" L0402_C 14.707,43.434 r90 top value=3.9nH
L401 "LQW15AN1N8C00D" L0402_C 15.398,45.593 r180 top value=1.8nH
L500 "LSEUC2520KKT6R8M" LSEUC2520KKT6R8M -3.708,18.313 r0 top value=6.8uH
L600 "DNP" L0402_C -5.69,0.686 r180 top
L601 "DNP" L0402_C 11.068,0.665 r180 top
L700 "74438323100" WURTH_74438323100_REDUCED -16.883,22.43 r0 top value=10uH
M400 "DMP22D4UFO-7B" DIODESINC_X2-DFN0604-3 16.034,34.456 r90 top
M500 "DMN2990UFZ-7B" DIODESINC_X2-DFN0606-3 -6.375,9.756 r90 top
M508 "DMP22D4UFO-7B" DIODESINC_X2-DFN0604-3 19.299,16.639 r270 top
M622 "DMN2990UFZ-7B" DIODESINC_X2-DFN0606-3 8.128,9.915 r90 top
M701 "DMN2990UFZ-7B" DIODESINC_X2-DFN0606-3 9.7,17.1 r0 top
M801 "DMP22D4UFO-7B" DIODESINC_X2-DFN0604-3 10.884,12.878 r180 top
Q1100 "NST3906DP6T5G" DIODESINC_SOT-963-6 -15.499,28.352 r270 top
Q1101 "NST3906DP6T5G" DIODESINC_SOT-963-6 -15.508,30.076 r270 top
Q1102 "BC847BLP-7B" DIODESINC_X1-DFN1006-3 -18.499,28.352 r90 top value=BC847BLP
Q1103 "BC847BLP-7B" DIODESINC_X1-DFN1006-3 -18.508,30.076 r90 top value=BC847BLP
Q1118 "BC847BLP-7B" DIODESINC_X1-DFN1006-3 -10.402,20.389 r90 top value=BC847BLP
Q1119 "BC847BLP-7B" DIODESINC_X1-DFN1006-3 -10.414,16.993 r90 top value=BC847BLP
Q1300 "DMN2990UFZ-7B" DIODESINC_X2-DFN0606-3 9.8,43.3 r90 top
R300 "CRCW020110K0FNED" R0201_C#1 20.417,22.455 r90 top value=10k
R301 "CRCW020110K0FNED" R0201_C#1 13.868,17.297 r180 top value=10k
R302 "CRCW02010000Z0ED" R0201_C#1 16.2,18.1 r180 top value=0R
R303 "CRCW02010000Z0ED" R0201_C#1 10.5,26.5 r180 top value=0R
R304 "CRCW0402200RFKEDHP" RES0402_REDUCED 22.265,21.518 r90 top value=200R
R400 "CRCW020110M0FNED" R0201_C#1 16.256,33.553 r180 top value=10M
R401 "CRCW0402200RFKEDHP" RES0402_REDUCED 39.802,54.458 r180 top value=200R
R402 "CRCW0402200RFKEDHP" RES0402_REDUCED 19.964,38.583 r270 top value=330
R403 "PA0201-R-070RL" R0201_C#1 15.398,46.409 r180 top value=0R (schematic designator R401)
R500 "CRCW02011M00FNED" R0201_C#1 -14.783,13.691 r90 top value=1M
R501 "CRCW02011M00FNED" R0201_C#1 -19.228,14.611 r90 top value=1M
R502 "SDR03EZPD4020" R0603 -18.999,16.942 r0 top value=402R
R503 "CRCW02011M00FNED" R0201_C#1 -17.831,13.335 r90 top value=1M
R504 "CRCW02011M00FNED" R0201_C#1 -14.783,15.011 r90 top value=1M
R505 "CRCW02012K00FNED" R0201_C#1 -16.408,11.684 r90 top value=2k
R506 "CRCW02011M00FNED" R0201_C#1 -13.665,16.281 r0 top value=1M
R507 "CRCW02011M00FNED" R0201_C#1 -17.014,15.891 r0 top value=1M
R508 "CRCW0201150KFKED" R0201_C#1 -12.291,16.284 r180 top value=150k
R509 "CRCW02012M40FNED" R0201_C#1 -17.094,11.684 r90 top value=2.4M
R510 "CRCW02011M60FNED" R0201_C#1 -18.491,13.335 r90 top value=1.6M
R511 "CRCW02011M60FNED" R0201_C#1 -15.771,15.951 r0 top value=1.6M
R512 "CRCW0201100KFNED" R0201_C#1 -15.646,14.986 r90 top value=100k
R513 "CRCW02011M00FNED" R0201_C#1 -15.646,13.691 r90 top value=1M
R514 "CRCW02011M00FNED" R0201_C#1 -18.683,15.895 r180 top value=1M
R515 "CRCW020110M0FNED" R0201_C#1 18.593,18.415 r0 top value=10M
R516 "CRCW020149K9FNED" R0201_C#1 18.593,17.704 r180 top value=49k9
R517 "CRCW020110M0FNED" R0201_C#1 19.685,18.136 r270 top value=10M
R518 "CRCW020149K9FNED" R0201_C#1 19.3,15.569 r270 top value=49k9
R519 "CRCW02010000Z0ED" R0201_C#1 -6.1,12.1 r270 top value=0R
R520 "CRCW020149K9FNED" R0201_C#1 16.434,13.165 r270 top value=49k9
R521 "CRCW02010000Z0ED" R0201_C#1 -8.763,14.173 r0 top value=0R
R522 "CRCW02011M00FNED" R0201_C#1 -6.477,13.411 r0 top value=1M
R523 "CRCW020110M0FNED" R0201_C#1 0.356,12.651 r270 top value=10M
R524 "CRCW02016M80FNED" R0201_C#1 0.356,13.845 r270 top value=6M8
R600 "CRCW020110M0FNED" R0201_C#1 -0.102,17.425 r0 top value=10M
R601 "CRCW02011M00FNED" R0201_C#1 -0.33,23.495 r180 top value=1M
R602 "CRCW020110M0FNED" R0201_C#1 -1.275,27.285 r0 top value=10M
R603 "CRCW02011M00FNED" R0201_C#1 0.914,26.416 r0 top value=1M
R604 "CRCW020110K0FNED" R0201_C#1 1.1,18.9 r0 top value=10k
R605 "CRCW02014K02FNED" R0201_C#1 1.1,17.3 r0 top value=4k02
R606 "CRCW02017K50FNED" R0201_C#1 1.1,18.1 r0 top value=7k5
R607 "RE0201BRE071ML" R0201_C#1 0.635,23.774 r270 top value=1M
R608 "CRCW02010000Z0ED" R0201_C#1 -5.582,-0.152 r180 top value=0R
R609 "CRCW020110M0FNED" R0201_C#1 -5.59,1.767 r0 top value=10M
R610 "RGC1/20C3903BPA" R0201_C#1 0.914,25.806 r180 top value=390k
R611 "CRCW020110M0FNED" R0201_C#1 3.632,17.348 r0 top value=10M
R612 "CRCW02011M00FNED" R0201_C#1 3.962,23.495 r180 top value=1M
R613 "CRCW020110M0FNED" R0201_C#1 2.972,27.285 r0 top value=10M
R614 "CRCW02010000Z0ED" R0201_C#1 11.176,-0.17 r180 top value=0R
R615 "CRCW020110M0FNED" R0201_C#1 5.676,2.337 r180 top value=10M
R616 "CRCW02011M00FNED" R0201_C#1 5.136,26.416 r0 top value=1M
R617 "CRCW020110K0FNED" R0201_C#1 4.921,18.9 r0 top value=10k
R618 "CRCW02014K02FNED" R0201_C#1 4.921,17.3 r0 top value=4k02
R619 "CRCW02017K50FNED" R0201_C#1 4.921,18.1 r0 top value=7k5
R620 "CRCW02015M10FNED" R0201_C#1 1.422,-0.533 r180 top value=5M1
R621 "RE0201BRE071ML" R0201_C#1 4.883,23.778 r270 top value=1M
R622 "RGC1/20C3903BPA" R0201_C#1 5.136,25.806 r180 top value=390k
R623 "CRCW02015M10FNED" R0201_C#1 -1.4,-0.529 r0 top value=5.1M
R624 "CRCW020110M0FNED" R0201_C#1 0,-0.529 r180 top value=10M
R625 "CRCW02011M00FNED" R0201_C#1 9.677,8.475 r270 top value=1M
R626 "CRCW02011M00FNED" R0201_C#1 7.188,9.811 r270 top value=1M
R627 "CRCW02011M00FNED" R0201_C#1 6.502,9.811 r90 top value=1M
R628 "CRCW02011M00FNED" R0201_C#1 7.597,11.283 r90 top value=1M
R629 "CRCW02011M00FNED" R0201_C#1 9.204,12.423 r180 top value=1M
R630 "CRCW02011M00FNED" R0201_C#1 7.874,12.423 r180 top value=1M
R700 "CRCW0201100KFNED" R0201_C#1 10.6,16.7 r270 top value=100k
R701 "CRCW0201100RFNED" R0201_C#1 2.416,15.763 r0 top value=100R
R702 "CRCW020110M0FNED" R0201_C#1 8.407,17.275 r180 top value=10M
R703 "CRCW020110M0FNED" R0201_C#1 -8.687,24.155 r270 top value=10M
R704 "CRCW020110M0FNED" R0201_C#1 2.406,14.175 r0 top value=10M
R705 "CRCW020110M0FNED" R0201_C#1 -8.051,24.155 r90 top value=10M
R706 "CRCW0201340KFKED" R0201_C#1 -13.7,26.5 r0 top value=340k
R707 "Resistor, DNP, 0402" RES0402_REDUCED -9.316,21.984 r180 top value=DNP
R708 "Resistor, DNP, 0402" RES0402_REDUCED -9.316,22.984 r180 top value=DNP
R709 "CRCW020110M0FNED" R0201_C#1 2.4,13.48 r0 top value=10M
R710 "CRCW020110K0FNED" R0201_C#1 4.953,15.191 r270 top value=10k
R711 "CRCW020140K2FNED" R0201_C#1 -13.581,23.218 r180 top value=40k2
R712 "CRCW020110M0FNED" R0201_C#1 2.997,2.769 r270 top value=10M
R713 "CRCW020110M0FNED" R0201_C#1 0.54,2.388 r180 top value=10M
R714 "CRCW0402200RFKEDHP" RES0402_REDUCED 12.243,8.966 r180 top value=200R
R715 "CRCW0402200RFKEDHP" RES0402_REDUCED -22.258,25.527 r270 top value=330
R716 "CRCW020110M0FNED" R0201_C#1 -7.394,17.234 r180 top value=10M
R717 "CRCW020110M0FNED" R0201_C#1 7.842,29.945 r180 top value=10M
R800 "CRCW02014M70FNED" R0201_C#1 11.836,13.132 r270 top value=4.7M
R801 "CRCW0201100KFNED" R0201_C#1 12.522,13.132 r270 top value=100k
R803 "CRCW020110M0FNED" R0201_C#1 15.088,13.767 r0 top value=10M
R804 "CRCW0201100KFNED" R0201_C#1 15.088,14.402 r0 top value=100k
R805 "CRCW0402200RFKEDHP" RES0402_REDUCED 17.857,9.195 r180 top value=330
R900 "CRCW02018K20FNED" R0201_C#1 -5.974,26.752 r270 top value=8.2k
R901 "CRCW020159K0FNED" R0201_C#1 -6.774,26.752 r270 top value=59k
R902 "CRCW02010000Z0ED" R0201_C#1 -6.774,25.352 r270 top value=0R
R903 "CRCW020110M0FNED" R0201_C#1 -4.826,20.828 r0 top value=10M
R906 "CRCW02010000Z0ED" R0201_C#1 -2.574,25.352 r270 top value=0R
R907 "CRCW02018K20FNED" R0201_C#1 -3.374,26.752 r270 top value=8.2k
R908 "CRCW020159K0FNED" R0201_C#1 -2.552,26.752 r270 top value=59k
R909 "CRCW02011M00FNED" R0201_C#1 -5.944,29.718 r90 top value=1M
R910 "CRCW0201200KFNED" R0201_C#1 -6.96,27.929 r0 top value=200k